# Altium PCB F4baseband.PcbDoc (part 1 of 2)
Units mm, origin at the board's own origin, x right, y up, seen from the top; angles counter-clockwise.
Board outline 50 x 50 mm, 4 copper layers (Top Layer, Internal Plane 1, Signal Layer 1, Bottom Layer), stack 1.642 mm thick; 224 components, 186 nets, 778 pads, 288 vias.
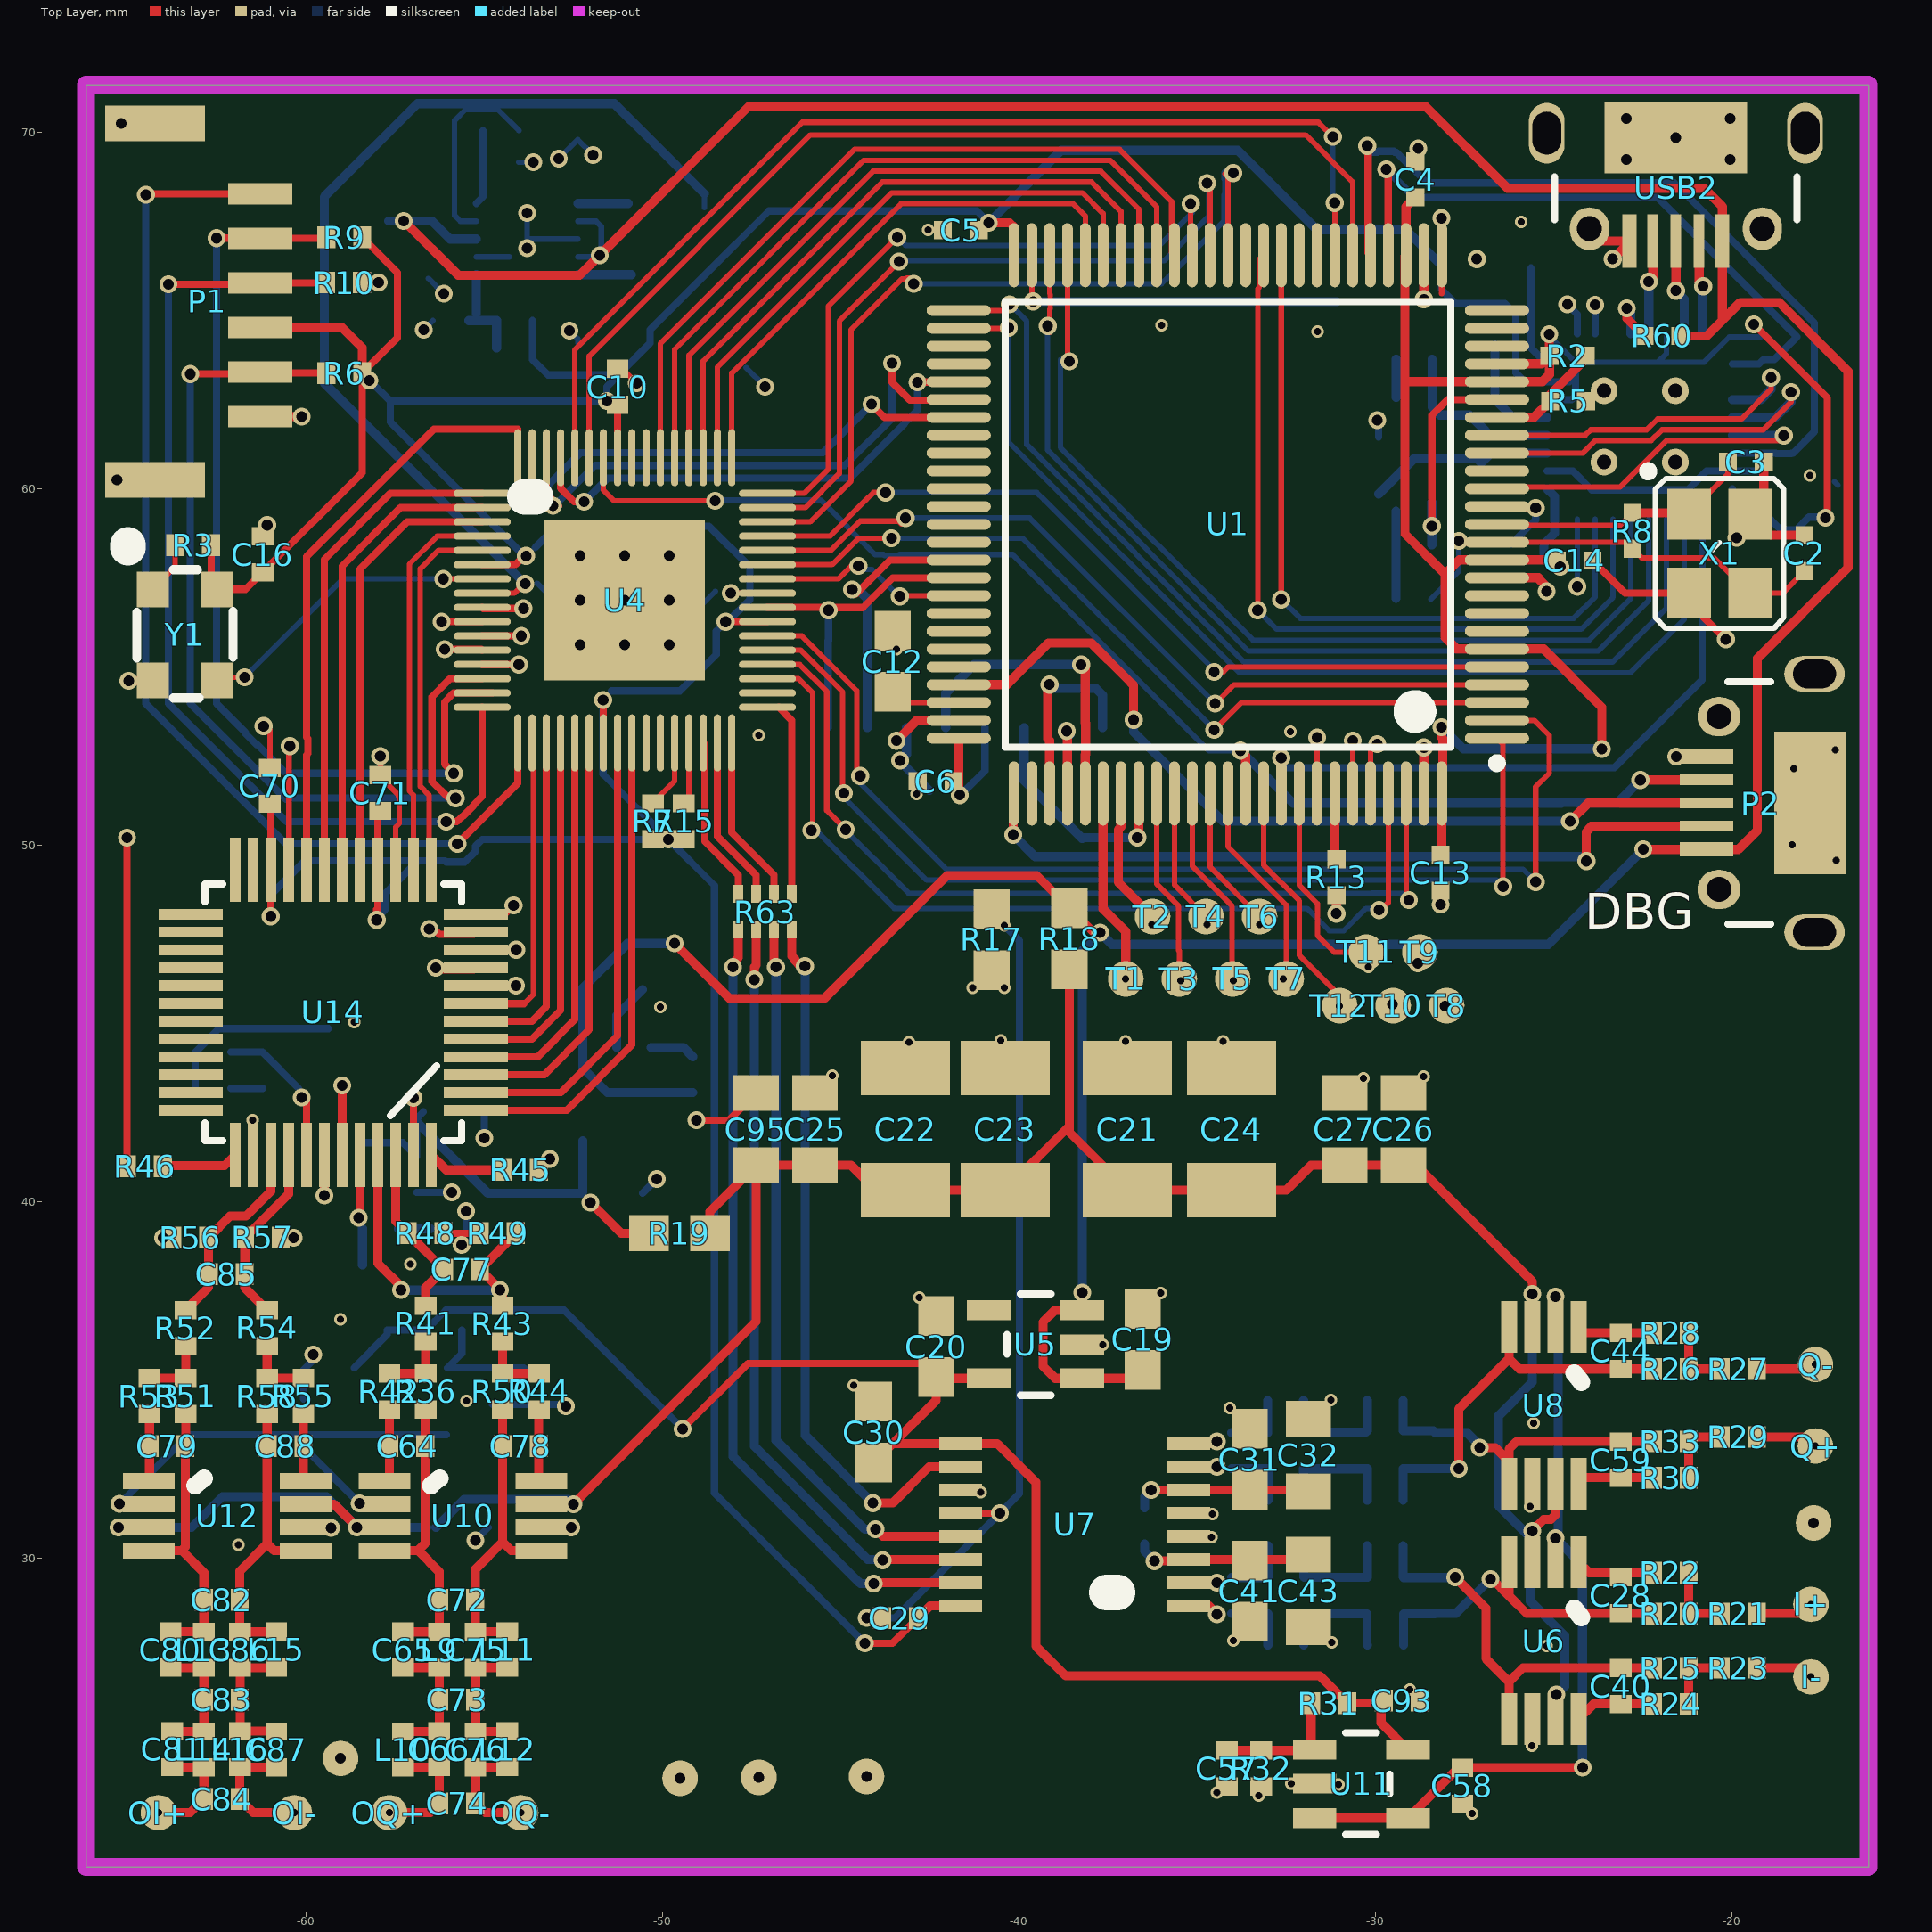
[diagram p0: Top Layer view]
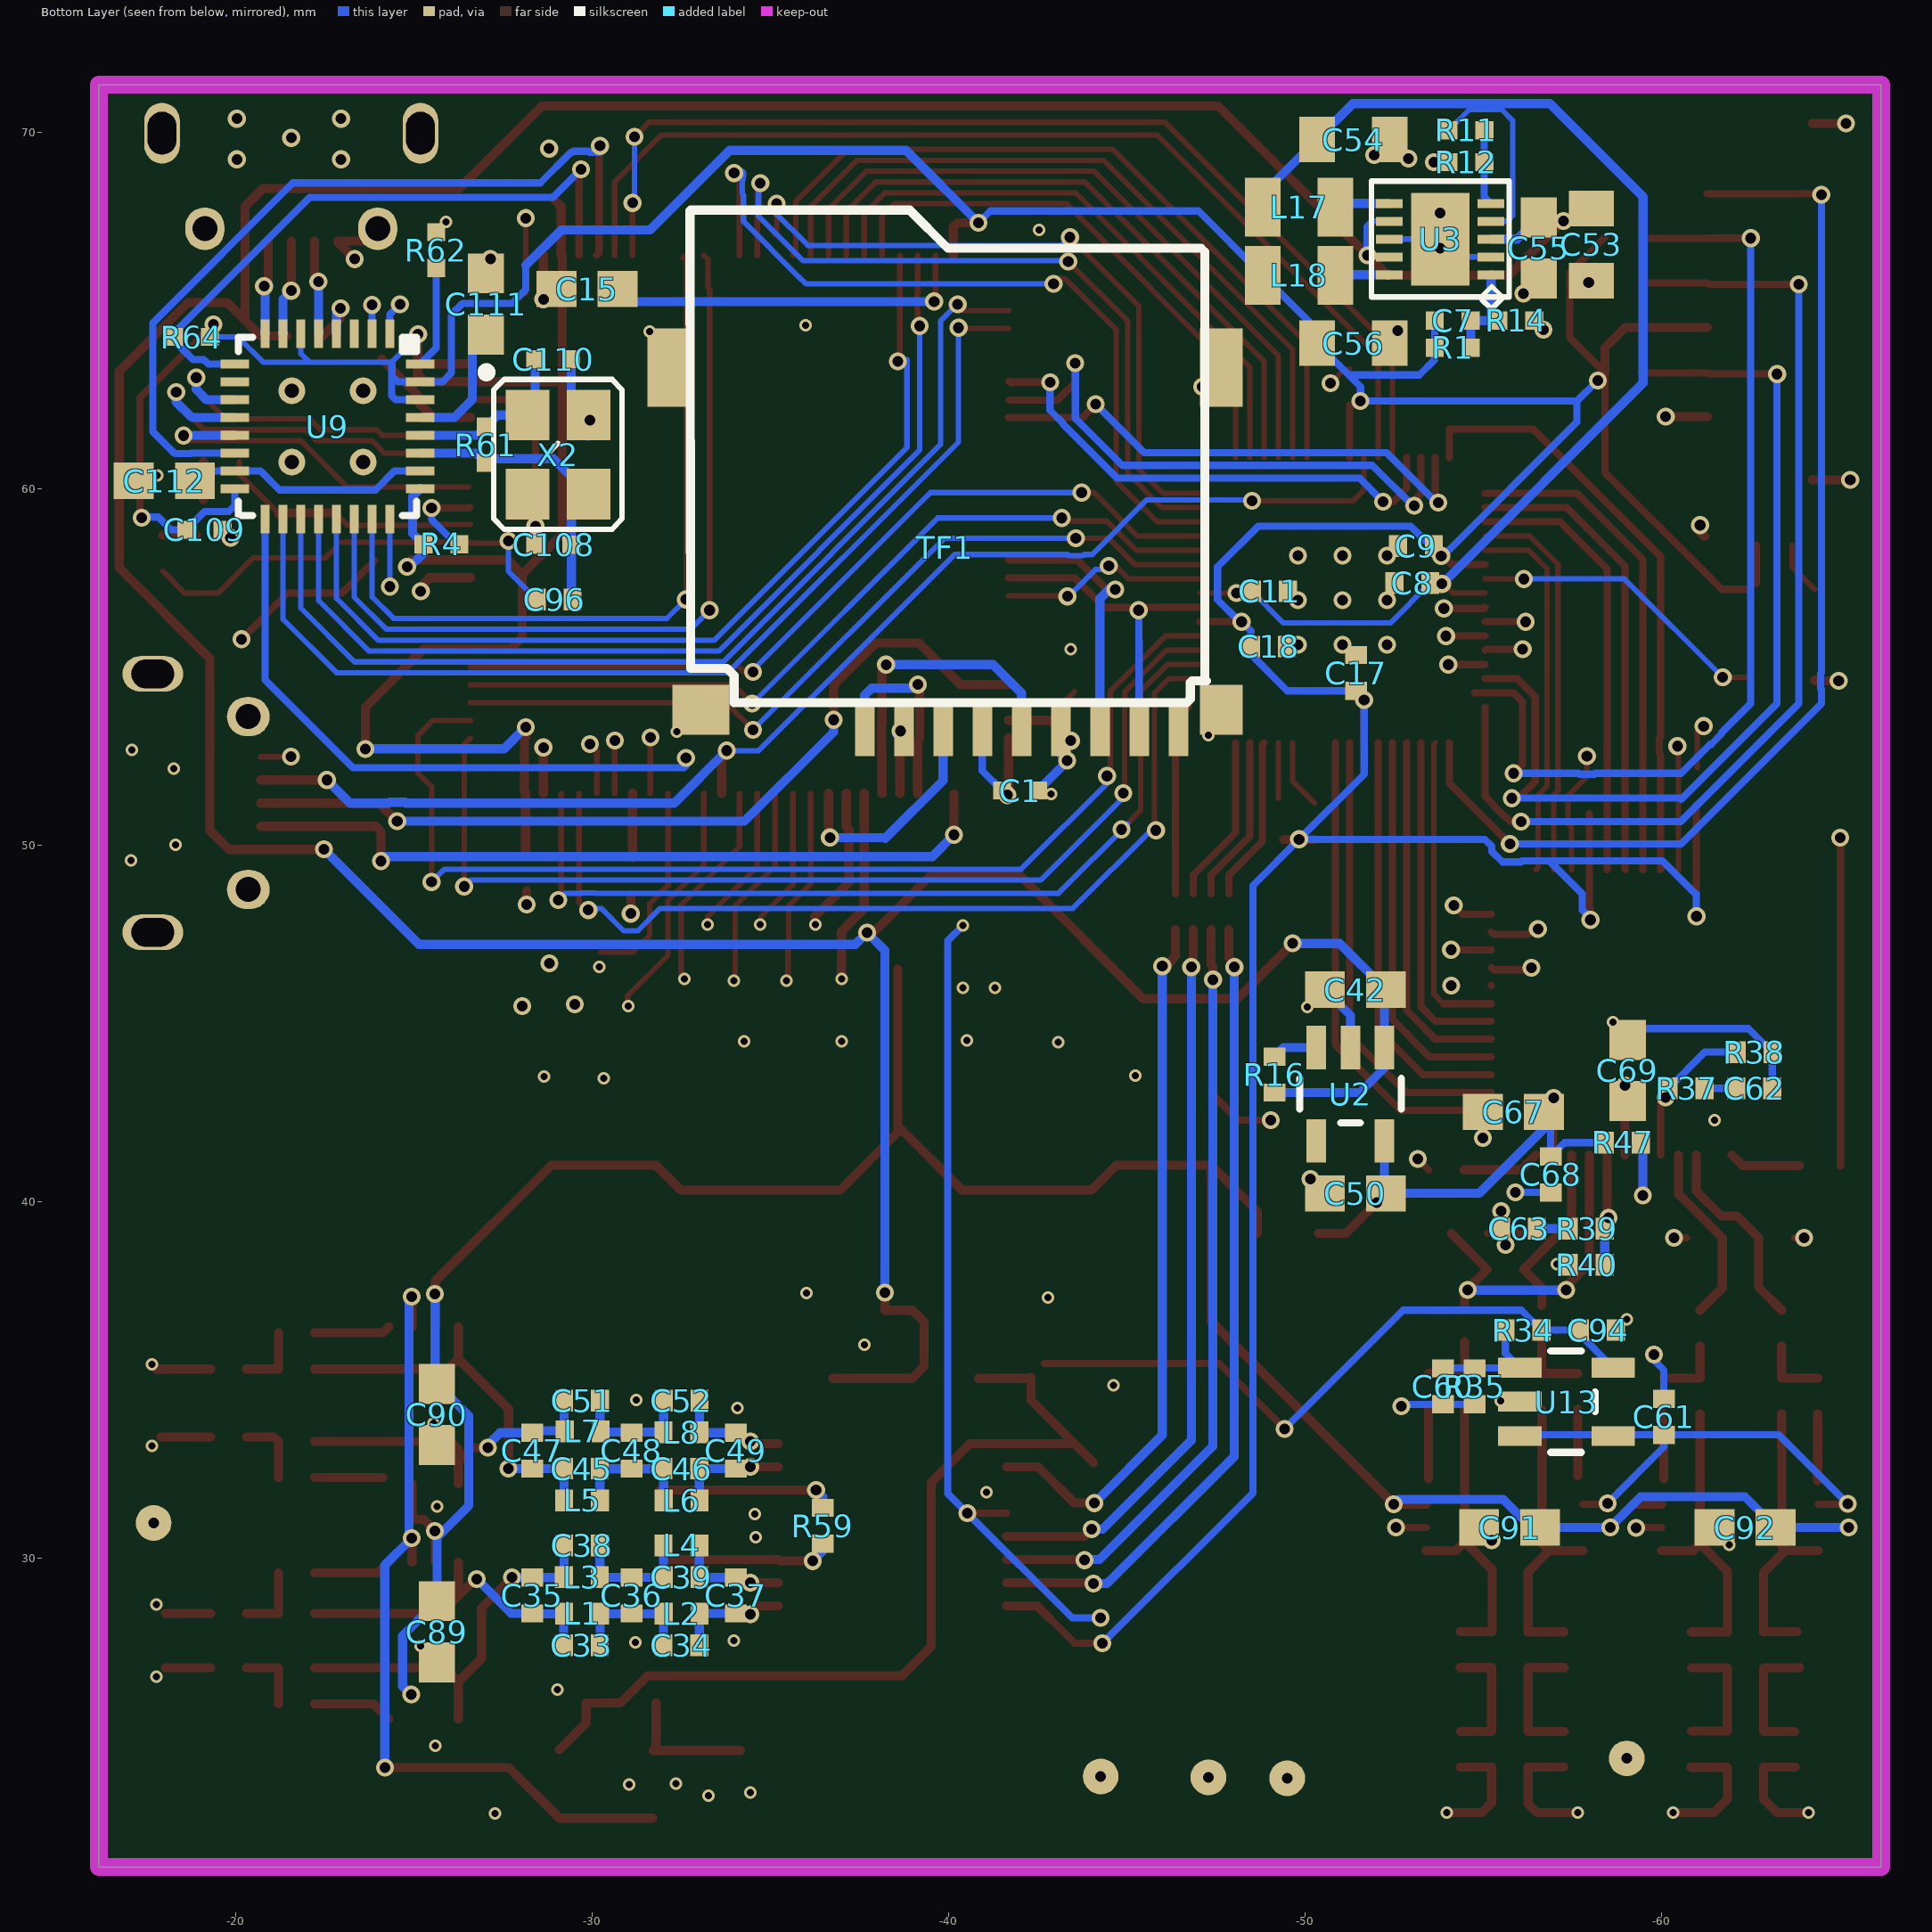
[diagram p1: Bottom Layer view, seen from below]
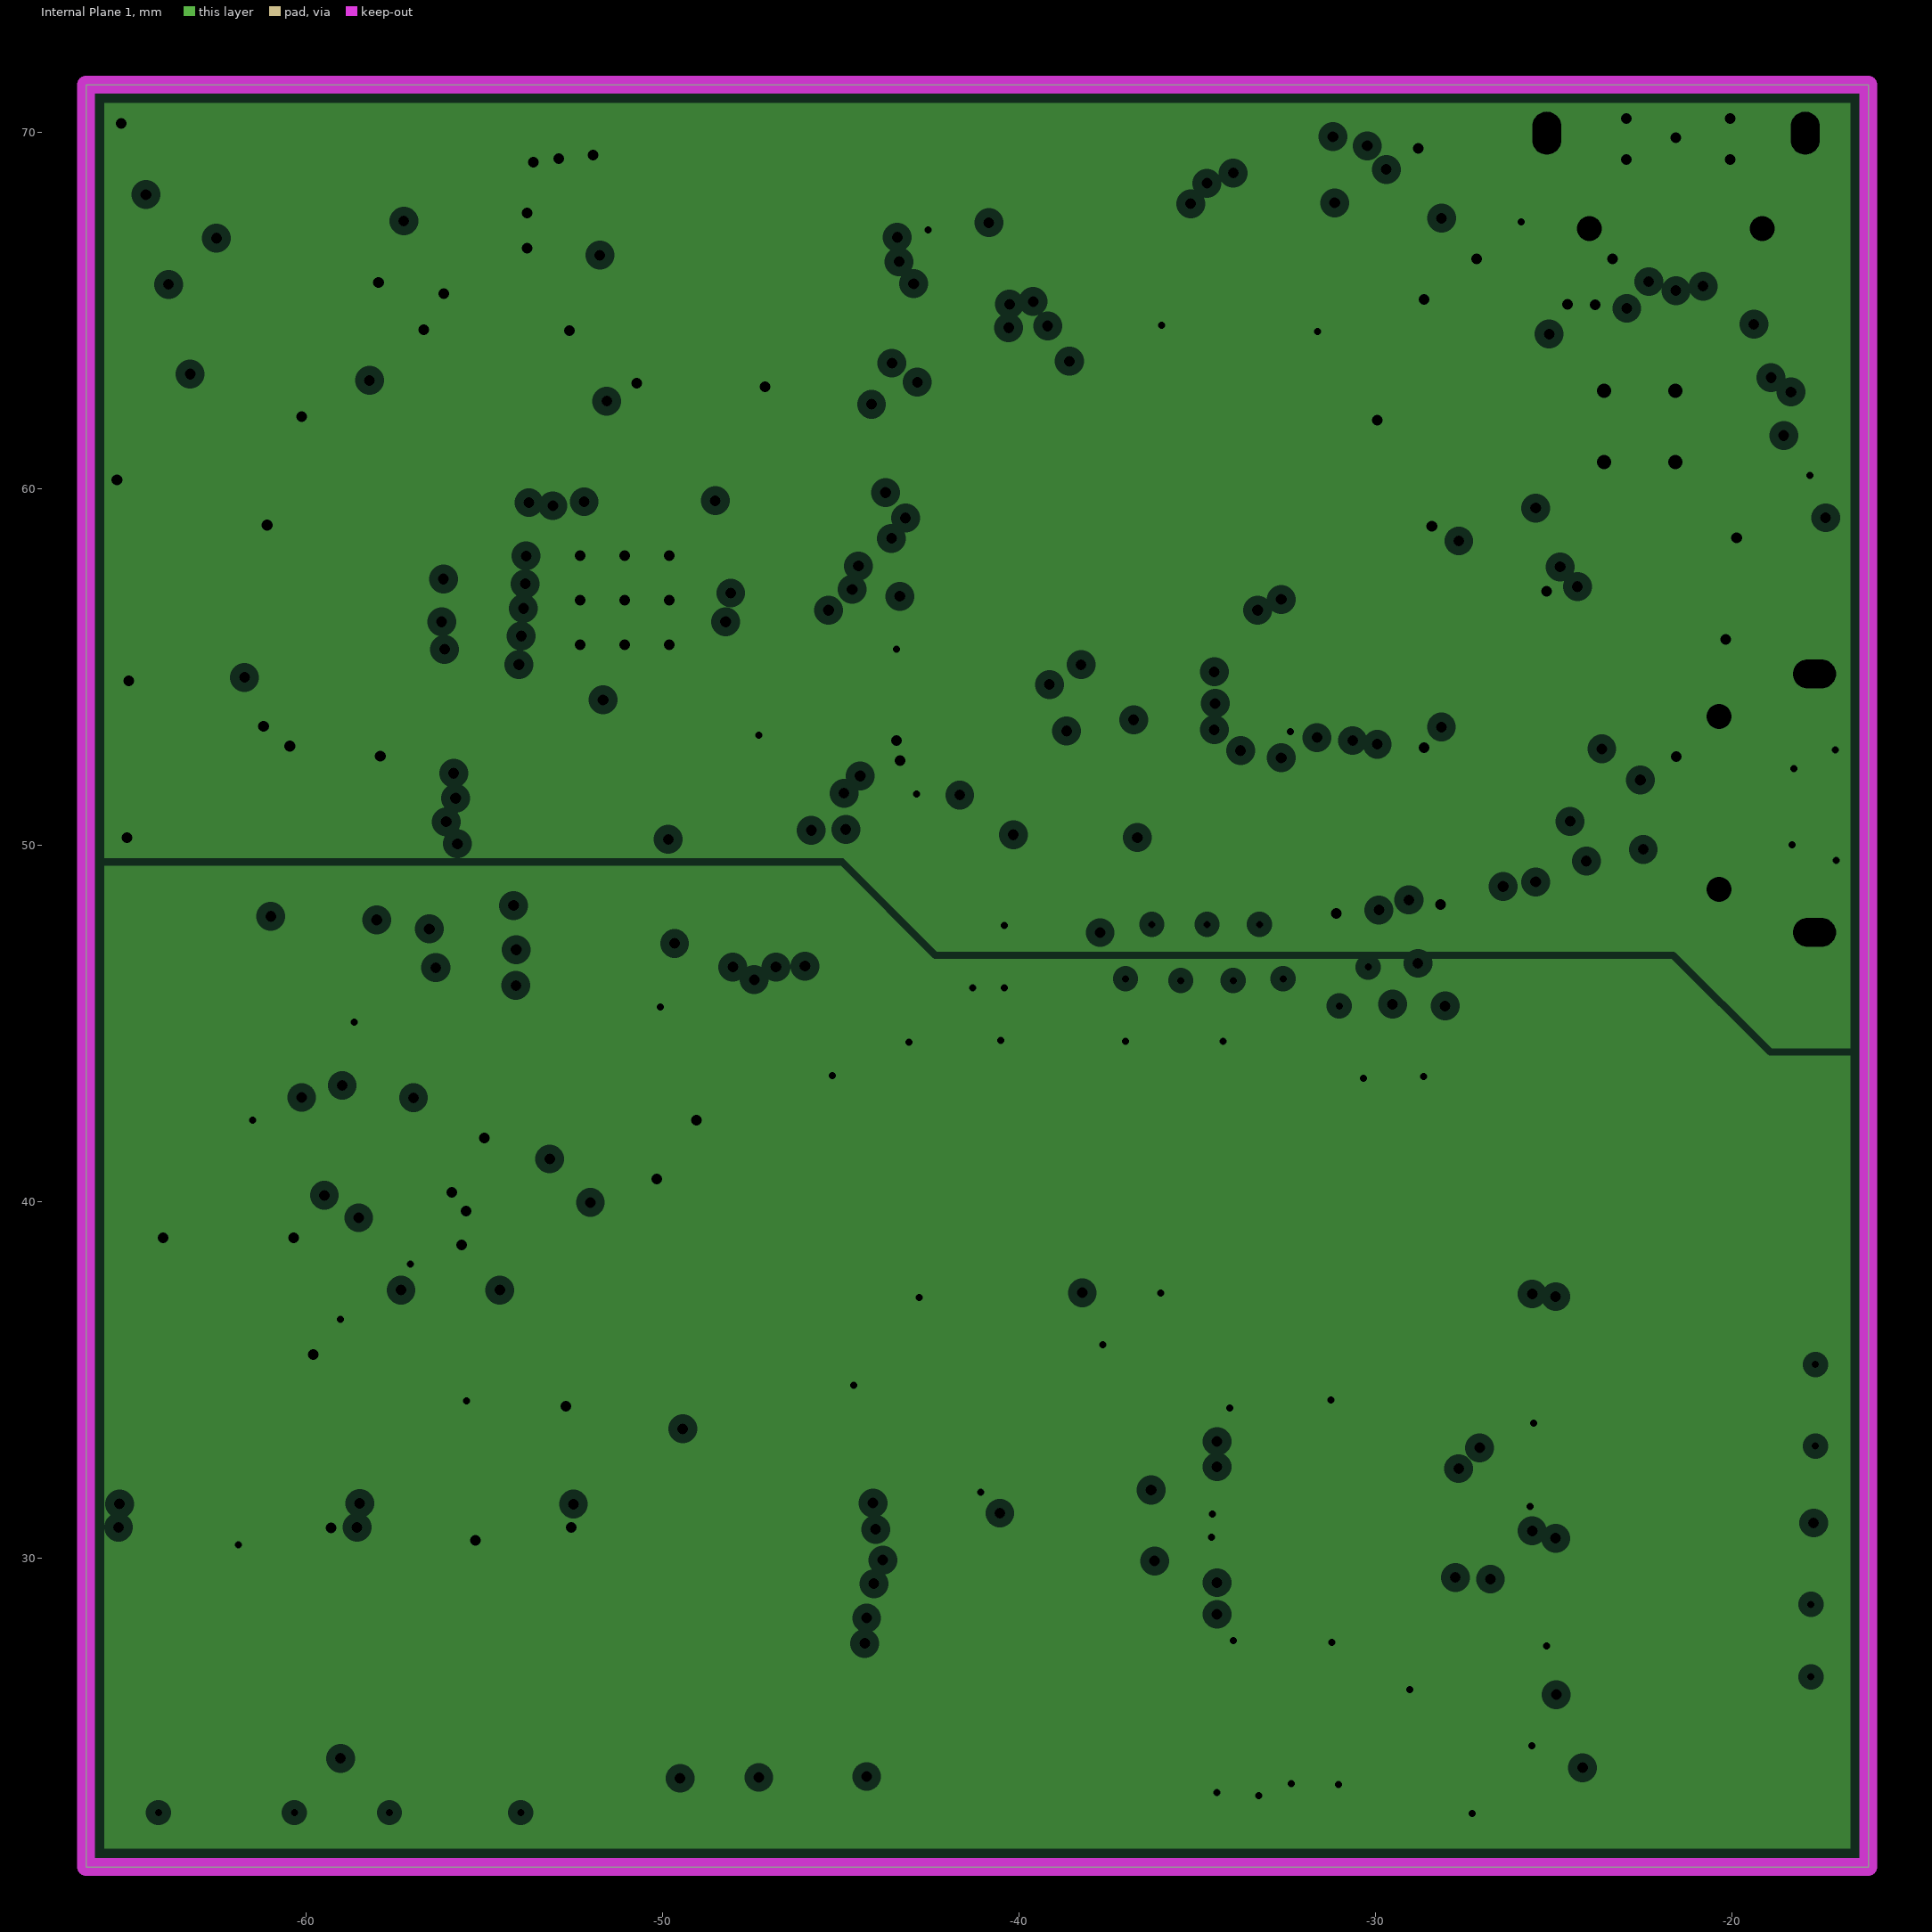
[diagram p2: Internal Plane 1, clearances drawn from the general rule]
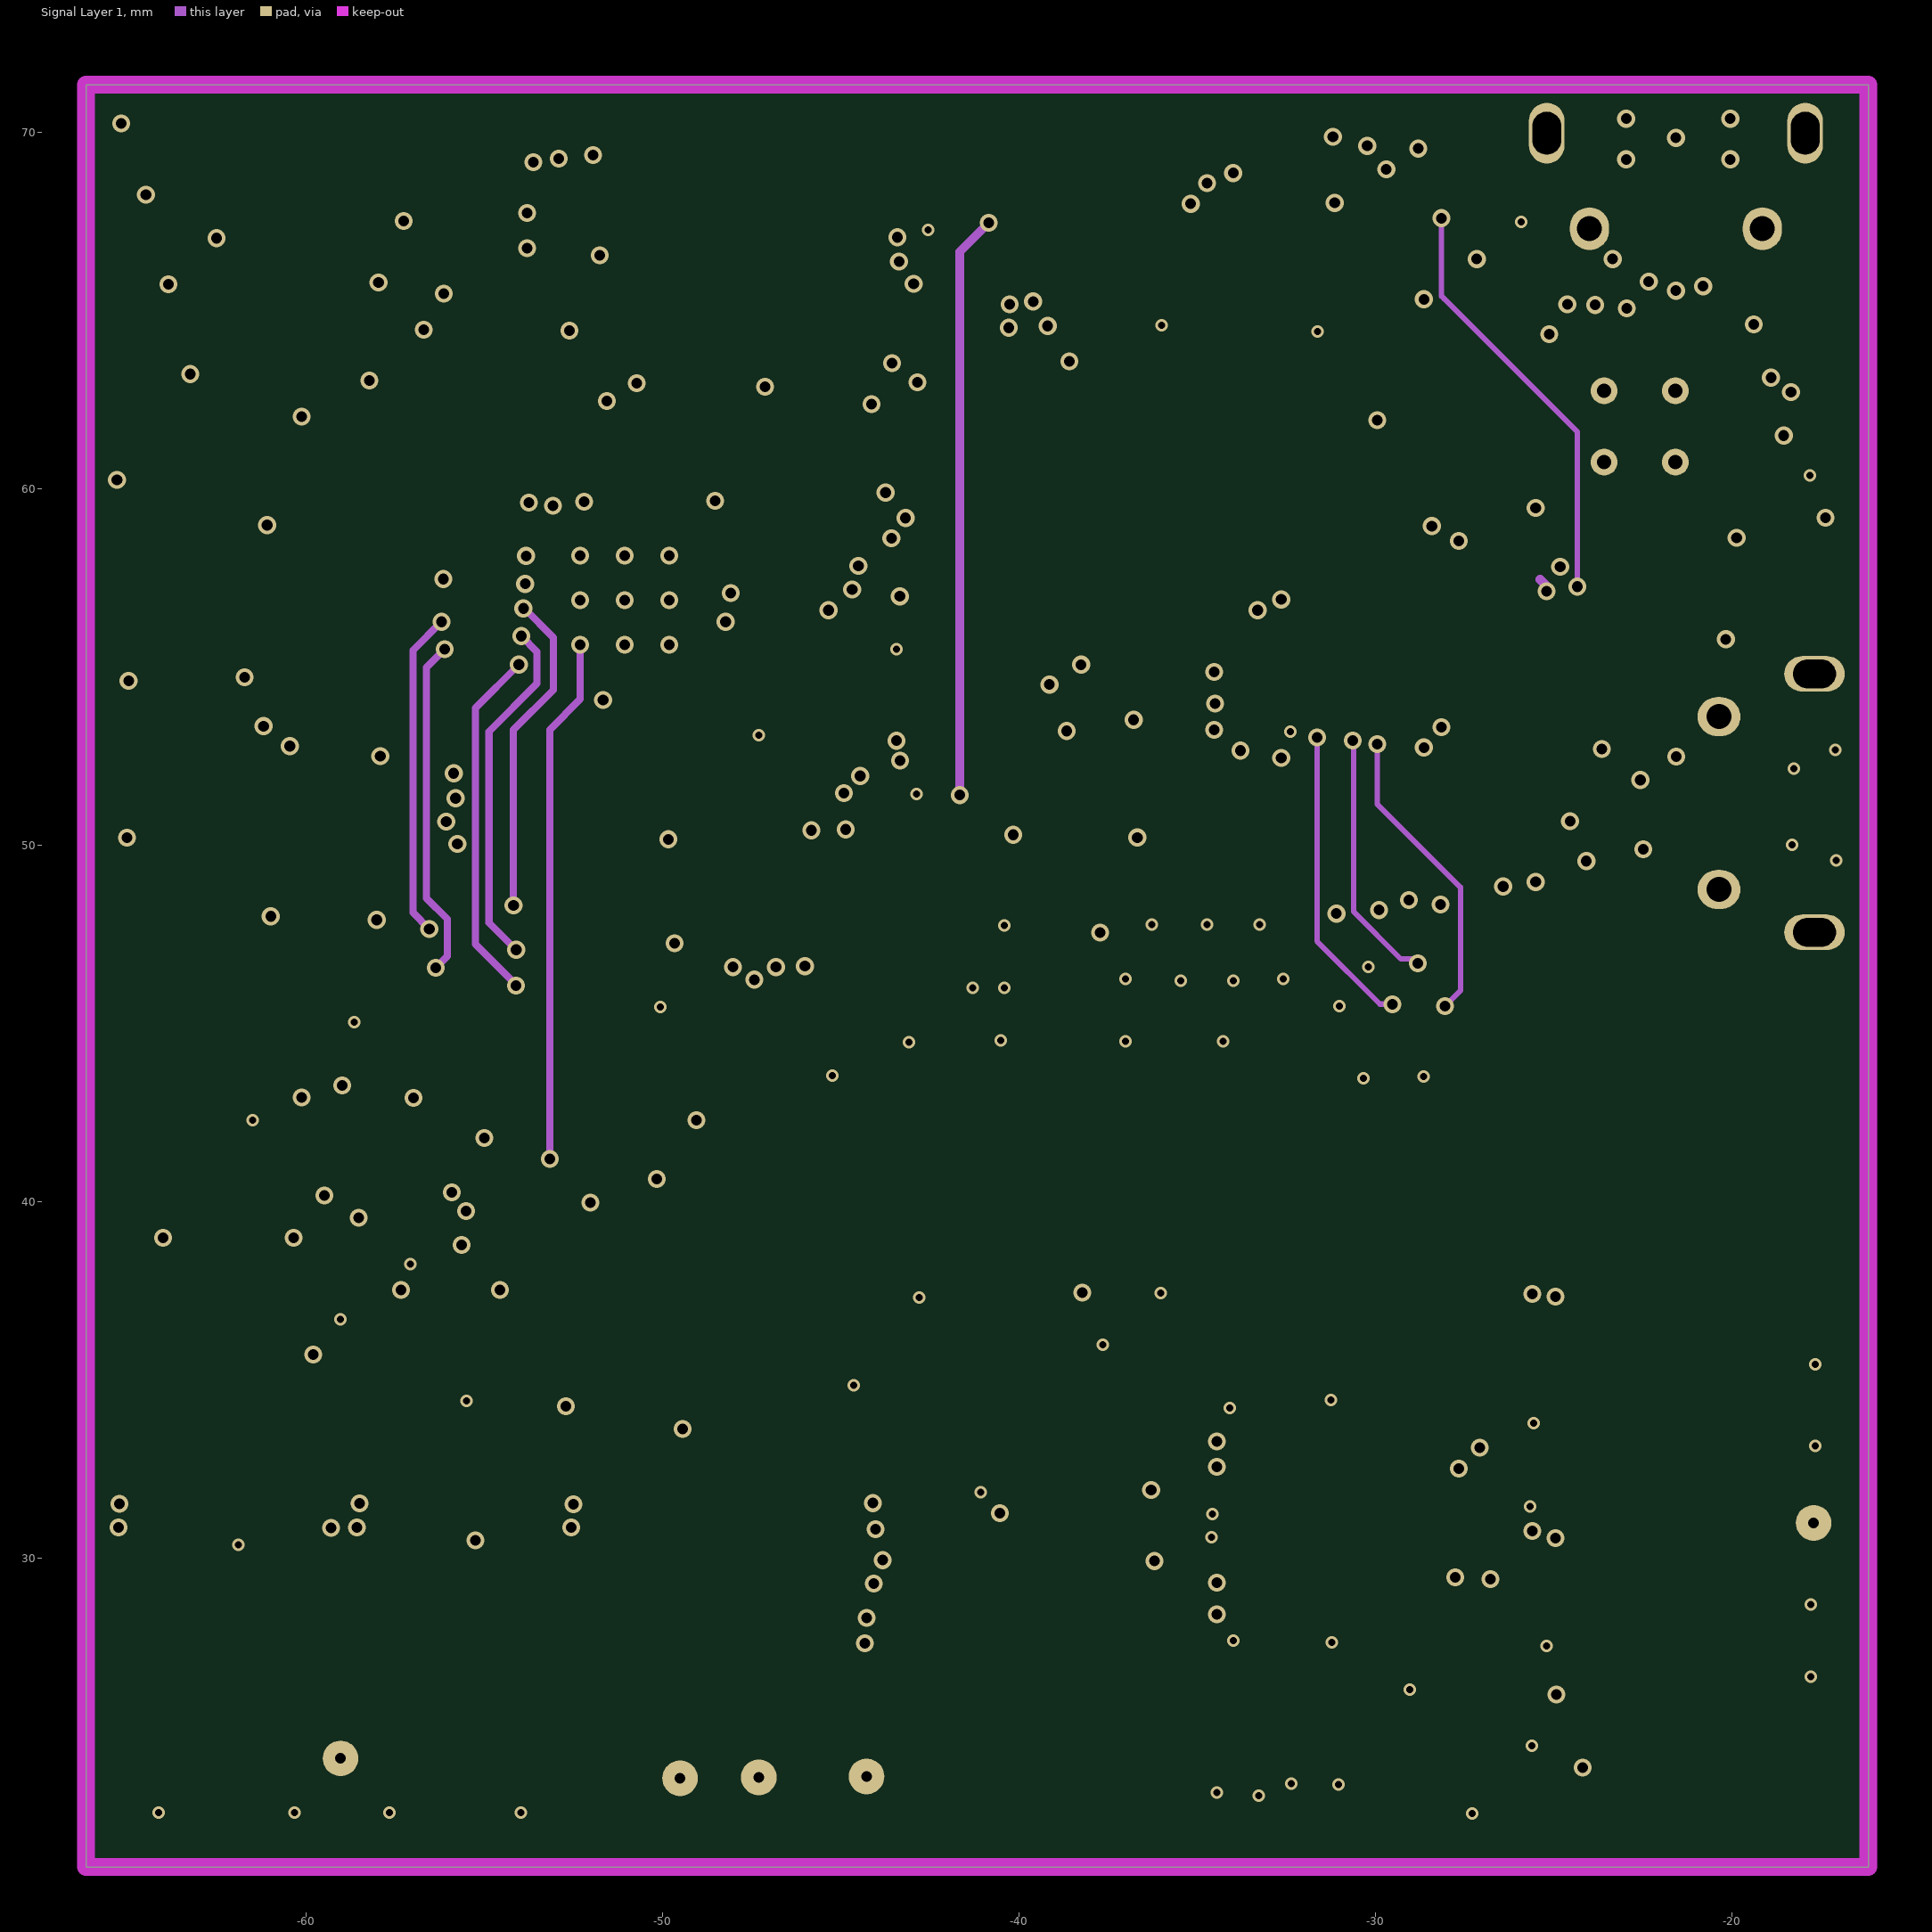
[diagram p3: Signal Layer 1]

## Layer stack, top to bottom
Top Solder: solder mask 0.0102, Solder Resist, Dk 3.5
Top Layer: signal copper 0.0356
Dielectric 1: core 0.1524, FR-4, Dk 4.2
Internal Plane 1: plane copper 0.036, net (Multiple Nets)
Dielectric 3: prepreg 1.1938, Dk 4.2
Signal Layer 1: signal copper 0.036
Dielectric 2: core 0.1524, Dk 4.2
Bottom Layer: signal copper 0.0356
Bottom Solder: solder mask 0.0102, Solder Resist, Dk 3.5

## Board outline
-66.167,21.336 -16.167,21.336 -16.167,71.336 -66.167,71.336

## Design rules (kind name [scope] priority, off if disabled: settings)
Clearance [All] p1: gap=0.152
DiffPairsRouting [All] p1: maxlimit=0.254 minlimit=0.254 mostfreqgap=0.254 toplayer_minwidth=0.152 toplayer_maxwidth=0.381 toplayer_prefwidth=0.381 midlayer1_minwidth=0.152 midlayer1_maxwidth=0.381 midlayer1_prefwidth=0.381 bottomlayer_minwidth=0.152 bottomlayer_maxwidth=0.381 bottomlayer_prefwidth=0.381 maxuncoupledlength=12.7
MinimumSolderMaskSliver [All] p1 off: minsoldermaskwidth=0.254
PlaneClearance [All] p1: clearance=0.254
PlaneConnect [All] p1: planeconnectstyle=Direct reliefexpansion=0.508 reliefentries=4 reliefconductorwidth=0.254 reliefairgap=0.254
PolygonConnect [All] p1: connectstyle=Direct reliefconductorwidth=0.254 reliefentries=4 polygonreliefangle="90 Angle" airgapwidth=0.254
RoomDefinition DAC [InComponentClass('DAC')] p1 off: confinementstyle=ConfineIn formatcopy=TRUE lockcomponents=FALSE outline -14.859,23.114 7.239,23.114 7.239,36.83 -14.859,36.83
RoomDefinition ADC [InComponentClass('ADC')] p2 off: confinementstyle=ConfineIn formatcopy=TRUE lockcomponents=FALSE outline -15.011,22.758 -1.016,22.758 -1.016,33.376 -15.011,33.376
RoomDefinition CPLD [InComponentClass('CPLD')] p3 off: confinementstyle=ConfineIn formatcopy=TRUE lockcomponents=FALSE outline -15.011,22.758 67.081,22.758 67.081,36.576 -15.011,36.576
RoomDefinition power [InComponentClass('power')] p4 off: confinementstyle=ConfineIn formatcopy=TRUE lockcomponents=FALSE outline -15.113,22.86 44.45,22.86 44.45,28.956 -15.113,28.956
RoomDefinition mcu2 [InComponentClass('mcu2')] p5 off: confinementstyle=ConfineIn formatcopy=TRUE lockcomponents=FALSE outline 36.576,20.32 224.155,20.32 224.155,30.48 36.576,30.48
RoomDefinition USB_HS [InComponentClass('USB_HS')] p6 off: confinementstyle=ConfineIn formatcopy=TRUE lockcomponents=FALSE outline 37.719,59.436 109.093,59.436 109.093,103.124 37.719,103.124
RoutingVias [All] p1: holewidth=0.305 width=0.508 viastyle="Through Hole" minholewidth=0.3 minwidth=0.5 maxholewidth=0.711 maxwidth=1.27
SilkToBoardRegionClearance [All] p1 off:
SilkToSilkClearance [All] p1 off: silktosilkclearance=0.254
SilkToSolderMaskClearance [IsPad] p1 off: minsilkscreentomaskgap=0.254 clearancetoexposedcopper=TRUE
SolderMaskExpansion [All] p1: expansion=0.102
UnpouredPolygon [All] p1: allowunpoured=FALSE
Width [All] p1: maxlimit=1.524 minlimit=0.152 preferedwidth=0.152
22 further rules are at their usual default settings.

## Classes and differential pairs
component class DAC: C60 C61 C62 C63 C64 C65 C66 C67 C68 C69 C70 C71 C72 C73 C74 C75 C76 C77 C78 C79 C80 C81 C82 C83 C84 C85 C86 C87 C88 C91 C92 C94 L9 L10 L11 L12 L13 L14 L15 L16 OI+ OI- OQ+ OQ- R34 R35 R36 R37 R38 R39 R40 R41 R42 R43 R44 R45 R46 R47 R48 R49 R50 R51 R52 R53 R54 R55 R56 R57 R58 U10 U12 U13 U14
component class CPLD: C8 C9 C10 C11 C16 C17 C18 P1 R3 R6 R7 R9 R10 R15 U4 Y1
component class power: C7 C19 C20 C21 C22 C23 C24 C25 C26 C27 C42 C50 C53 C54 C55 C56 C95 L17 L18 R1 R11 R12 R14 R16 R17 R18 R19 U2 U3 U5
component class USB_HS: C108 C109 C110 C111 C112 R60 R61 R62 R64 U9 USB2 X2
component class mcu2: C1 C2 C3 C4 C5 C6 C12 C13 C14 C15 C96 P2 R2 R4 R5 R8 R13 T1 T2 T3 T4 T5 T6 T7 T8 T9 T10 T11 T12 TF1 U1 X1
component class ADC: C28 C29 C30 C31 C32 C33 C34 C35 C36 C37 C38 C39 C40 C41 C43 C44 C45 C46 C47 C48 C49 C51 C52 C57 C58 C59 C89 C90 C93 I+ I- L1 L2 L3 L4 L5 L6 L7 L8 Q+ Q- R20 R21 R22 R23 R24 R25 R26 R27 R28 R29 R30 R31 R32 R33 R59 R63 U6 U7 U8 U11

## Components (designator, comment, footprint, x,y, rotation, side; value= is the part's Value field where it differs from the comment)
C1 "0.1uF" 0402#1 -42.012,51.537 r0 bottom
C2 "22pF" 0402#1 -17.958,58.191 r90 top
C3 "22pF" 0402#1 -19.609,60.757 r0 top
C4 "0.1uF * 5" 0402#1 -28.88,68.682 r270 top
C5 "1n" 0402#1 -41.631,67.259 r0 top
C6 "1n" 0402#1 -42.342,51.791 r0 top
C7 "33pF" 0402#1 -54.153,64.718 r0 bottom
C8 "0.1uF" 0402#2 -53.01,57.353 r180 bottom
C9 "0.1uF" 0402#2 -53.111,58.395 r180 bottom
C10 "0.1uF" 0402#2 -51.257,62.865 r270 top
C11 "0.1uF" 0402#2 -49.022,57.125 r0 bottom
C12 "2.2uF" 0603 -43.536,55.169 r270 top
C13 "1n" 0402#1 -28.169,49.225 r90 top
C14 "1n" 0402#1 -24.409,57.988 r180 top
C15 "2.2uF" 0603 -29.87,65.608 r0 bottom
C16 "0.1uF" 0402#2 -61.214,58.166 r270 top
C17 "0.1uF" 0402#2 -51.435,54.839 r270 bottom
C18 "0.1uF" 0402#2 -48.997,55.575 r0 bottom
C19 "4.7uF" 0603 -36.525,36.144 r270 top
C20 "4.7uF" 0603 -42.316,35.941 r270 top
C21 "220uF" 1210 -36.957,42.037 r270 top
C22 "220uF" 1210 -43.18,42.037 r270 top
C23 "220uF" 1210 -40.386,42.037 r270 top
C24 "220uF" 1210 -34.036,42.037 r270 top
C25 "10uF" 0805 -45.72,42.037 r270 top
C26 "10uF" 0805 -29.21,42.037 r270 top
C27 "10uF" 0805 -30.861,42.037 r270 top
C28 "NC" 0402#2 -23.114,28.956 r90 top
C29 "0.1uF" 0402#2 -43.332,28.321 r180 top
C30 "0.1uF" 0603 -44.069,33.528 r90 top
C31 "10uF" 0603 -33.528,32.766 r90 top
C32 "1uF" 0805 -31.877,32.893 r90 top
C33 "NC" 0402#2 -29.718,27.559 r0 bottom
C34 "NC" 0402#2 -32.512,27.559 r0 bottom
C35 "NC" 0402#2 -28.321,28.956 r270 bottom
C36 "NC" 0402#2 -31.115,28.956 r270 bottom
C37 "NC" 0402#2 -34.036,28.956 r270 bottom
C38 "NC" 0402#2 -29.718,30.353 r180 bottom
C39 "NC" 0402#2 -32.512,29.464 r180 bottom
C40 "NC" 0402#2 -23.114,26.416 r270 top
C41 "1uF" 0603 -33.528,29.083 r270 top
C42 "4.7uF" 0603 -51.41,45.949 r180 bottom
C43 "10uF" 0805 -31.877,29.083 r270 top
C44 "NC" 0402#2 -23.114,35.814 r90 top
C45 "NC" 0402#2 -29.718,32.512 r0 bottom
C46 "NC" 0402#2 -32.512,32.512 r0 bottom
C47 "NC" 0402#2 -28.321,33.02 r270 bottom
C48 "NC" 0402#2 -31.115,33.02 r270 bottom
C49 "NC" 0402#2 -34.036,33.02 r270 bottom
C50 "4.7uF" 0603 -51.41,40.234 r180 bottom
C51 "NC" 0402#2 -29.718,34.417 r180 bottom
C52 "NC" 0402#2 -32.512,34.417 r180 bottom
C53 "10UF" 0805 -58.039,66.852 r90 bottom
C54 "4.7UF" 0805 -51.359,69.798 r0 bottom
C55 "33pF" 0603 -56.566,66.75 r90 bottom
C56 "4.7UF" 0805 -51.359,64.083 r0 bottom
C57 "0.1uF" 0402#2 -34.163,24.105 r270 top
C58 "0.1uF" 0402#2 -27.559,23.622 r270 top
C59 "NC" 0402#2 -23.114,32.766 r270 top
C60 "0.1uF" 0402#2 -53.873,34.823 r270 bottom
C61 "0.1uF" 0402#2 -60.071,33.96 r90 bottom
C62 "22nF" 0402#2 -62.611,43.18 r0 bottom
C63 "22nF" 0402#2 -56.007,39.243 r180 bottom
C64 "NC" 0402#2 -57.15,33.147 r180 top
C65 "NC" 0402#2 -57.277,27.432 r90 top
C66 "NC" 0402#2 -56.261,24.638 r90 top
C67 "NC" 0603 -55.855,42.52 r0 bottom
C68 "NC" 0402#2 -56.896,40.767 r270 bottom
C69 "NC" 0603 -59.055,43.688 r270 bottom
C70 "NC" 0402#2 -61.011,51.664 r90 top
C71 "NC" 0402#2 -57.912,51.46 r90 top
C72 "NC" 0402#2 -55.753,28.829 r180 top
C73 "NC" 0402#2 -55.753,26.035 r180 top
C74 "NC" 0402#2 -55.753,23.114 r180 top
C75 "NC" 0402#2 -55.245,27.432 r270 top
C76 "NC" 0402#2 -55.245,24.638 r270 top
C77 "NC" 0402#2 -55.626,38.1 r0 top
C78 "NC" 0402#2 -53.975,33.147 r0 top
C79 "NC" 0402#2 -63.881,33.147 r180 top
C80 "NC" 0402#2 -63.805,27.432 r90 top
C81 "NC" 0402#2 -63.754,24.638 r90 top
C82 "NC" 0402#2 -62.357,28.829 r180 top
C83 "NC" 0402#2 -62.357,26.035 r180 top
C84 "NC" 0402#2 -62.357,23.241 r180 top
C85 "NC" 0402#2 -62.23,37.973 r0 top
C86 "NC" 0402#2 -61.849,27.432 r270 top
C87 "NC" 0402#2 -60.833,24.638 r270 top
C88 "NC" 0402#2 -60.579,33.147 r0 top
C89 "1uF" 0603 -25.654,27.94 r270 bottom
C90 "1uF" 0603 -25.654,34.036 r270 bottom
C91 "1uF" 0603 -55.753,30.861 r0 bottom
C92 "1uF" 0603 -62.357,30.861 r0 bottom
C93 "0.1uF" 0402#2 -29.261,26.01 r0 top
C94 "0.1uF" 0402#2 -58.217,36.398 r180 bottom
C95 "10uF" 0805 -47.371,42.037 r270 top
C96 "NC/0.1uF" 0402#2 -28.956,56.896 r0 bottom
C108 "10pF" 0402#1 -28.915,58.429 r180 bottom
C109 "1uF" 0402#1 -19.126,58.852 r180 bottom
C110 "10pF" 0402#1 -28.915,63.636 r0 bottom
C111 "1uF" 0603 -27.026,65.176 r90 bottom
C112 "1uF" 0603 -18.009,60.223 r0 bottom
I+ "TestPad" "TestPad - 1mm" -17.78,28.702 r180 top
I- "TestPad" "TestPad - 1mm" -17.78,26.67 r180 top
L1 "0R" 0402#2 -29.718,28.448 r180 bottom
L2 "0R" 0402#2 -32.512,28.448 r180 bottom
L3 "0R" 0402#2 -29.718,29.464 r0 bottom
L4 "0R" 0402#2 -32.512,30.353 r0 bottom
L5 "0R" 0402#2 -29.718,31.623 r180 bottom
L6 "0R" 0402#2 -32.512,31.623 r180 bottom
L7 "0R" 0402#2 -29.743,33.553 r0 bottom
L8 "0R" 0402#2 -32.512,33.528 r0 bottom
L9 "0R" 0402#2 -56.261,27.432 r270 top
L10 "0R" 0402#2 -57.277,24.638 r270 top
L11 "0R" 0402#2 -54.356,27.432 r90 top
L12 "0R" 0402#2 -54.356,24.638 r90 top
L13 "0R" 0402#2 -62.865,27.432 r270 top
L14 "0R" 0402#2 -62.865,24.638 r270 top
L15 "0R" 0402#2 -60.833,27.432 r90 top
L16 "0R" 0402#2 -61.849,24.638 r90 top
L17 "2.2UH" 0806 -49.835,67.893 r0 bottom
L18 "2.2uH" 0806 -49.835,65.988 r0 bottom
OI+ "TestPad" "TestPad - 1mm" -64.135,22.86 r0 top
OI- "TestPad" "TestPad - 1mm" -60.325,22.86 r0 top
OQ+ "TestPad" "TestPad - 1mm" -57.658,22.86 r0 top
OQ- "TestPad" "TestPad - 1mm" -53.975,22.86 r0 top
P1 "JTAG-6P" GH1.25-6 -62.738,65.151 r270 top
P2 "SWD_MicroUSB" MICRO-YZX -14.859,51.181 r90 top
Q+ "TestPad" "TestPad - 1mm" -17.653,33.147 r180 top
Q- "TestPad" "TestPad - 1mm" -17.653,35.433 r180 top
R1 "300k" 0402#1 -54.153,63.956 r0 bottom
R2 "0R" 0402#1 -24.613,63.729 r0 top
R3 "10k" 0402#2 -63.17,58.42 r0 top
R4 "10k" 0402#1 -25.781,58.445 r0 bottom
R5 "NC" 0402#1 -24.587,62.459 r180 top
R6 "10k" 0402#2 -58.928,63.246 r0 top
R7 "10k" 0402#2 -50.267,50.673 r270 top
R8 "" 0402#1 -22.784,58.826 r270 top
R9 "10k" 0402#2 -58.928,67.056 r0 top
R10 "1k" 0402#2 -58.928,65.786 r180 top
R11 "360K" 0402#1 -54.534,70.052 r0 bottom
R12 "180k" 0402#1 -54.534,69.163 r0 bottom
R13 "10k" 0402#1 -31.09,49.098 r90 top
R14 "68k" 0402#1 -55.931,64.718 r180 bottom
R15 "10k" 0402#2 -49.403,50.673 r270 top
R16 "10K" 0402#2 -49.149,43.561 r90 bottom
R17 "0R" 0603 -40.767,47.346 r90 top
R18 "0R" 0603 -38.583,47.371 r90 top
R19 "NC" 0603 -49.53,39.116 r0 top
R20 "1.33k" 0402#2 -21.717,28.448 r0 top
R21 "1.33k" 0402#2 -19.812,28.448 r0 top
R22 "931R" 0402#2 -21.717,29.591 r0 top
R23 "1.33k" 0402#2 -19.812,26.924 r0 top
R24 "931R" 0402#2 -21.717,25.908 r0 top
R25 "1.33k" 0402#2 -21.717,26.924 r0 top
R26 "1.33k" 0402#2 -21.717,35.306 r0 top
R27 "1.33k" 0402#2 -19.812,35.306 r0 top
R28 "931R" 0402#2 -21.717,36.322 r0 top
R29 "1.33k" 0402#2 -19.812,33.401 r0 top
R30 "931R" 0402#2 -21.717,32.258 r0 top
R31 "1.33k" 0402#2 -31.293,25.933 r180 top
R32 "1.33k" 0402#2 -33.198,24.105 r270 top
R33 "1.33k" 0402#2 -21.717,33.274 r0 top
R34 "1.33k" 0402#2 -56.134,36.398 r0 bottom
R35 "1.33k" 0402#2 -54.762,34.823 r270 bottom
R36 "1.33k" 0402#2 -56.642,34.671 r90 top
R37 "256R" 0402#2 -60.706,43.18 r180 bottom
R38 "2k" 0402#2 -62.611,44.196 r180 bottom
R39 "256R" 0402#2 -57.912,39.243 r0 bottom
R40 "2k" 0402#2 -57.912,38.227 r0 bottom
R41 "1.33k" 0402#2 -56.642,36.576 r90 top
R42 "931R" 0402#2 -57.658,34.671 r90 top
R43 "1.33k" 0402#2 -54.483,36.576 r90 top
R44 "931R" 0402#2 -53.467,34.671 r90 top
R45 "1k" 0402#2 -53.975,40.894 r0 top
R46 "1k" 0402#2 -64.516,40.996 r180 top
R47 "1k" 0402#2 -58.928,41.656 r0 bottom
R48 "50" 0402#2 -56.642,39.116 r180 top
R49 "50" 0402#2 -54.61,39.116 r180 top
R50 "1.33k" 0402#2 -54.483,34.671 r90 top
R51 "1.33k" 0402#2 -63.373,34.544 r90 top
R52 "1.33k" 0402#2 -63.373,36.449 r90 top
R53 "931R" 0402#2 -64.389,34.544 r90 top
R54 "1.33k" 0402#2 -61.087,36.449 r90 top
R55 "931R" 0402#2 -60.071,34.544 r90 top
R56 "50" 0402#2 -63.246,38.989 r0 top
R57 "50" 0402#2 -61.214,38.989 r0 top
R58 "1.33k" 0402#2 -61.087,34.544 r90 top
R59 "NC/0R" 0402#2 -36.474,30.912 r270 bottom
R60 "10k" 0402#1 -21.946,64.287 r180 top
R61 "1MR" 0402#1 -27.026,61.239 r270 bottom
R62 "12k 1%" 0402#1 -25.629,66.7 r270 bottom
R63 "Res*4" 0402X4 -47.117,48.133 r270 top
R64 "10k" 0402#1 -18.771,64.262 r180 bottom
T1 "TestPad" "TestPad - 1mm" -37,46.25 r0 top
T2 "TestPad" "TestPad - 1mm" -36.25,48 r0 top
T3 "TestPad" "TestPad - 1mm" -35.5,46.25 r0 top
T4 "TestPad" "TestPad - 1mm" -34.75,48 r0 top
T5 "TestPad" "TestPad - 1mm" -34,46.25 r0 top
T6 "TestPad" "TestPad - 1mm" -33.25,48 r0 top
T7 "TestPad" "TestPad - 1mm" -32.5,46.25 r0 top
T8 "TestPad" "TestPad - 1mm" -28,45.5 r180 top
T9 "TestPad" "TestPad - 1mm" -28.75,47 r180 top
T10 "TestPad" "TestPad - 1mm" -29.5,45.5 r270 top
T11 "TestPad" "TestPad - 1mm" -30.25,47 r270 top
T12 "TestPad" "TestPad - 1mm" -31,45.5 r270 top
TF1 "TF" TF -47.65,63.398 r0 bottom
U1 "STM32F427VGT6" LQFP100_N -34.138,59.004 r180 top
U2 "RT9013-3.3GB" SOT23-5 -51.283,43.028 r0 bottom
U3 "Tps62410" DFN-10P-3X3 -53.772,67.004 r0 bottom
U4 "5M160ZE64" 5M160ZE64 -51.054,56.871 r0 top
U5 "RT9013-2.5GB" SOT23-5 -39.522,35.992 r90 top
U6 "DiffAmp" MSOP8/VSSOP8 -25.273,27.686 r270 top
U7 "AD7537" AD7357 -38.43,30.937 r180 top
U8 "DiffAmp" MSOP8/VSSOP8 -25.273,34.29 r270 top
U9 "USB3300_1" USB3300 -22.581,61.747 r270 bottom
U10 "DiffAmp" MSOP8/VSSOP8 -55.601,31.191 r0 top
U11 "OP-SOT23" SOT23-5 -30.404,23.673 r270 top
U12 "DiffAmp" MSOP8/VSSOP8 -62.205,31.191 r0 top
U13 "OP-SOT23" SOT23-5 -57.328,34.392 r270 bottom
U14 "AD9767" AD9767 -59.233,45.314 r180 top
USB2 "USB Micro Type B" MICRO-YZX -21.565,72.796 r180 top
X1 "8mhz" OSCILLATOR-3.2X2.5 -20.345,58.191 r270 top
X2 "24mhz" OSCILLATOR-3.2X2.5 -29.042,60.969 r270 bottom
Y1 "OSC_50M" TXC_7Q -63.398,55.905 r270 top

## Footprints (in the part's own frame and the unit in brackets; to place one, negate y for a bottom-side part, rotate by r counter-clockwise, add the part's x,y. Pads: shape width x height; smd on the part's side, far side on the other; paste and mask are expansions set on the pad)
5M160ZE64 [mm]
  rect 4.5x4.5 smd: 0(0,0)
  oval 1.6x0.2 smd: 1(-4,3) 2(-4,2.6) 3(-4,2.2) 4(-4,1.8) 5(-4,1.4) 6(-4,1) 7(-4,0.6) 8(-4,0.2) 9(-4,-0.2) 10(-4,-0.6) 11(-4,-1) 12(-4,-1.4) 13(-4,-1.8) 14(-4,-2.2) 15(-4,-2.6) 16(-4,-3) 33(4,-3) 34(4,-2.6) 35(4,-2.2) 36(4,-1.8) 37(4,-1.4) 38(4,-1) 39(4,-0.6) 40(4,-0.2) 41(4,0.2) 42(4,0.6) 43(4,1) 44(4,1.4) 45(4,1.8) 46(4,2.2) 47(4,2.6) 48(4,3)
  oval 0.2x1.6 smd: 17(-3,-4) 18(-2.6,-4) 19(-2.2,-4) 20(-1.8,-4) 21(-1.4,-4) 22(-1,-4) 23(-0.6,-4) 24(-0.2,-4) 25(0.2,-4) 26(0.6,-4) 27(1,-4) 28(1.4,-4) 29(1.8,-4) 30(2.2,-4) 31(2.6,-4) 32(3,-4) 49(3,4) 50(2.6,4) 51(2.2,4) 52(1.8,4) 53(1.4,4) 54(1,4) 55(0.6,4) 56(0.2,4) 57(-0.2,4) 58(-0.6,4) 59(-1,4) 60(-1.4,4) 61(-1.8,4) 62(-2.2,4) 63(-2.6,4) 64(-3,4)
  silkscreen extent -2.8,2.9 -2.5,2.9, body extent -3.5,-3.5 3.5,3.5, height 1
0402#1 [mil] "0402-RES"
  rect 20x20 smd: 1(-19.68,0) 2(20,0)
0402#2 [mil] "0402-RES"
  rect 20x24 smd: 1(-19.68,0) 2(20,0)
0402X4 [mm]
  rect 0.5x0.28 smd: 1(-0.5,0.75) 2(-0.5,0.25) 3(-0.5,-0.25) 4(-0.5,-0.75) 5(0.5,-0.75) 6(0.5,-0.25) 7(0.5,0.25) 8(0.5,0.75)
0603 [mil] "0603-RES"
  rect 44x40 smd: 1(-33.46,0) 2(34,0)
0805 [mm]
  rect 1x1.27 smd: 1(-1.016,0) 2(1.016,0)
  body extent -1.27,-0.76 1.27,0.76, height 0.8
0806 [mm]
  rect 1x1.65 smd: 1(-1.016,0) 2(1.016,0)
  body extent -1,-0.8 1,0.8, height 0.5
1210 [mm]
  rect 1.52x2.5 smd: 1(-1.715,0) 2(1.715,0)
AD7357 [mm]
  rect 1.2x0.35 smd: 1(-3.2,2.275) 2(-3.2,1.625) 3(-3.2,0.975) 4(-3.2,0.325) 5(-3.2,-0.325) 6(-3.2,-0.975) 7(-3.2,-1.625) 8(-3.2,-2.275) 9(3.2,-2.275) 10(3.2,-1.625) 11(3.2,-0.975) 12(3.2,-0.325) 13(3.2,0.325) 14(3.2,0.975) 15(3.2,1.625) 16(3.2,2.275)
  silkscreen extent -1.2,1.9 -0.9,1.9, body extent -2.2,-2.5 2.2,2.5, height 1.2
AD9767 [mm]
  rect 1.8x0.3 smd: 1(-4,2.75) 2(-4,2.25) 3(-4,1.75) 4(-4,1.25) 5(-4,0.75) 6(-4,0.25) 7(-4,-0.25) 8(-4,-0.75) 9(-4,-1.25) 10(-4,-1.75) 11(-4,-2.25) 12(-4,-2.75) 25(4,-2.75) 26(4,-2.25) 27(4,-1.75) 28(4,-1.25) 29(4,-0.75) 30(4,-0.25) 31(4,0.25) 32(4,0.75) 33(4,1.25) 34(4,1.75) 35(4,2.25) 36(4,2.75)
  rect 0.3x1.8 smd: 13(-2.75,-4) 14(-2.25,-4) 15(-1.75,-4) 16(-1.25,-4) 17(-0.75,-4) 18(-0.25,-4) 19(0.25,-4) 20(0.75,-4) 21(1.25,-4) 22(1.75,-4) 23(2.25,-4) 24(2.75,-4) 37(2.75,4) 38(2.25,4) 39(1.75,4) 40(1.25,4) 41(0.75,4) 42(0.25,4) 43(-0.25,4) 44(-0.75,4) 45(-1.25,4) 46(-1.75,4) 47(-2.25,4) 48(-2.75,4)
  silkscreen extent -3.6,-3.6 3.6,3.6
DFN-10P-3X3 [mm]
  rect 0.75x0.25 smd mask+0.064: 1(-1.451,0.999) 2(-1.451,0.499) 3(-1.451,-0.001) 4(-1.451,-0.501) 5(-1.451,-1.001) 6(1.4,-1.001) 7(1.4,-0.501) 8(1.4,-0.001) 9(1.4,0.499) 10(1.4,0.999)
  rect 1.64x2.6 smd: 11(-0.025,-0.001)
  silkscreen extent -1.96,-1.63 1.9,1.95
GH1.25-6 [mm]
  rect 1x2.8 smd: 0(-5.1,-1.5) 0(4.9,-1.5)
  rect 0.6x1.8 smd: 1(-3.125,1.45) 2(-1.875,1.45) 3(-0.625,1.45) 4(0.625,1.45) 5(1.875,1.45) 6(3.125,1.45)
  body extent -5.48,-3.1 5.27,1.75, height 4.25
LQFP100_N [mm]
  oval 1.8x0.3 smd: 1(-7.55,6) 2(-7.55,5.5) 3(-7.55,5) 4(-7.55,4.5) 5(-7.55,4) 6(-7.55,3.5) 7(-7.55,3) 8(-7.55,2.5) 9(-7.55,2) 10(-7.55,1.5) 11(-7.55,1) 12(-7.55,0.5) 13(-7.55,0) 14(-7.55,-0.5) 15(-7.55,-1) 16(-7.55,-1.5) 17(-7.55,-2) 18(-7.55,-2.5) 19(-7.55,-3) 20(-7.55,-3.5) 21(-7.55,-4) 22(-7.55,-4.5) 23(-7.55,-5) 24(-7.55,-5.5) 25(-7.55,-6) 51(7.55,-6) 52(7.55,-5.5) 53(7.55,-5) 54(7.55,-4.5) 55(7.55,-4) 56(7.55,-3.5) 57(7.55,-3) 58(7.55,-2.5) 59(7.55,-2) 60(7.55,-1.5) 61(7.55,-1) 62(7.55,-0.5) 63(7.55,0) 64(7.55,0.5) 65(7.55,1) 66(7.55,1.5) 67(7.55,2) 68(7.55,2.5) 69(7.55,3) 70(7.55,3.5) 71(7.55,4) 72(7.55,4.5) 73(7.55,5) 74(7.55,5.5) 75(7.55,6)
  oval 0.3x1.8 smd: 26(-6,-7.55) 27(-5.5,-7.55) 28(-5,-7.55) 29(-4.5,-7.55) 30(-4,-7.55) 31(-3.5,-7.55) 32(-3,-7.55) 33(-2.5,-7.55) 34(-2,-7.55) 35(-1.5,-7.55) 36(-1,-7.55) 37(-0.5,-7.55) 38(0,-7.55) 39(0.5,-7.55) 40(1,-7.55) 41(1.5,-7.55) 42(2,-7.55) 43(2.5,-7.55) 44(3,-7.55) 45(3.5,-7.55) 46(4,-7.55) 47(4.5,-7.55) 48(5,-7.55) 49(5.5,-7.55) 50(6,-7.55) 76(6,7.55) 77(5.5,7.55) 78(5,7.55) 79(4.5,7.55) 80(4,7.55) 81(3.5,7.55) 82(3,7.55) 83(2.5,7.55) 84(2,7.55) 85(1.5,7.55) 86(1,7.55) 87(0.5,7.55) 88(0,7.55) 89(-0.5,7.55) 90(-1,7.55) 91(-1.5,7.55) 92(-2,7.55) 93(-2.5,7.55) 94(-3,7.55) 95(-3.5,7.55) 96(-4,7.55) 97(-4.5,7.55) 98(-5,7.55) 99(-5.5,7.55) 100(-6,7.55)
  silkscreen extent -7.68,-6.25 6.25,6.82
MICRO-YZX [mm]
  rect 0.4x1.5 smd: 1(-1.3,5.85) 5(1.3,5.85)
  rect 0.3x1.5 smd: 2(-0.65,5.85) 3(0,5.85) 4(0.65,5.85)
  oval 1x1.7 hole 0.8 slot 1.2 at 90 deg: 5(-3.625,2.82) 5(3.625,2.82)
  oval 1.1x1.2 hole 0.7: 5(-2.425,5.5) 5(2.425,5.5)
  rect 4x2 smd: 5(0,2.95)
  silkscreen extent -3.4,4.05 3.4,5.25
MSOP8/VSSOP8 [mm]
  rect 1.45x0.45 smd: 1(-2.2,0.975) 2(-2.2,0.325) 3(-2.2,-0.325) 4(-2.2,-0.975) 5(2.2,-0.975) 6(2.2,-0.325) 7(2.2,0.325) 8(2.2,0.975)
  silkscreen extent -0.9,0.85 -0.65,1.05
OSCILLATOR-3.2X2.5 [mil] "OSCILLATOR-3.2X2.5"
  rect 56x48 smd: 1(-43.31,-33.46) 2(44,-33.46) 3(44,34) 4(-43.31,34)
  silkscreen extent -95,-83 83,71
SOT23-5 [mil] "SOT23-5"
  rect 22x48 smd: 1(-37.4,-51.19) 2(0,-51.19) 3(38,-51.19) 4(38,52) 5(-37.4,52)
  silkscreen extent -56,-17 56,32
"TestPad - 1mm" [mm]
  round 1 smd: 1(0,0)
TF [mm]
  rect 0.55x1.6 smd: 1(10,10.1) 2(8.9,10.1) 3(7.8,10.1) 4(6.7,10.1) 5(5.6,10.1) 6(4.5,10.1) 7(3.4,10.1) 8(2.3,10.1) 9(1.2,10.1)
  rect 1.2x2.2 smd: SHELL(0,0) SHELL(15.5,0)
  rect 1.2x1.4 smd: SHELL(0,9.6)
  rect 1.6x1.4 smd: SHELL(14.6,9.6)
  silkscreen extent 0.41,-4.42 14.9,9.4
TXC_7Q [mm]
  rect 1x0.9 smd: 1(-1.275,-0.9) 2(1.275,-0.9) 3(1.275,0.9) 4(-1.275,0.9)
  silkscreen extent -2.52,-1.6 1.78,1.35
USB3300 [mm]
  round 0.75 hole 0.4: 0(-1,-1) 0(-1,1) 0(1,-1) 0(1,1)
  rect 0.8x0.25 smd: 1(-2.6,1.75) 2(-2.6,1.25) 3(-2.6,0.75) 4(-2.6,0.25) 5(-2.6,-0.25) 6(-2.6,-0.75) 7(-2.6,-1.25) 8(-2.6,-1.75) 17(2.6,-1.75) 18(2.6,-1.25) 19(2.6,-0.75) 20(2.6,-0.25) 21(2.6,0.25) 22(2.6,0.75) 23(2.6,1.25) 24(2.6,1.75)
  rect 0.25x0.8 smd: 9(-1.75,-2.6) 10(-1.25,-2.6) 11(-0.75,-2.6) 12(-0.25,-2.6) 13(0.25,-2.6) 14(0.75,-2.6) 15(1.25,-2.6) 16(1.75,-2.6) 25(1.75,2.6) 26(1.25,2.6) 27(0.75,2.6) 28(0.25,2.6) 29(-0.25,2.6) 30(-0.75,2.6) 31(-1.25,2.6) 32(-1.75,2.6)
  silkscreen extent -2.5,-2.5 2.5,2.5, body extent -2.5,-2.5 2.5,2.5, height 0.85

## Part data
C1 C2 C3 C4 C5 C6 C12 C13 C14 C15 C29 C30 C31 C32 C41 C43 C89 C90 C91 C92 C96 C108 C109 C110 C111 C112: library part CAP0402-CAP, "<b>Capacitor</b> / Standard 0603 ceramic capacitor, and 0.1\" leaded capacitor."
C7 C53 C54 C55 C56: library part CAP/0402
C8 C9 C10 C11 C16 C17 C18 C19 C20 C21 C22 C23 C24 C25 C26 C27 C28 C33 C34 C35 C36 C37 C38 C39 C40 C42 C44 C45 C46 C47 C48 C49 C50 C51 C52 C57 C58 C59 C60 C61 C62 C63 C64 C65 C66 C67 C68 C69 C70 C71 C72 C73 C74 C75 C76 C77 C78 C79 C80 C81 C82 C83 C84 C85 C86 C87 C88 C93 C94 C95: library part Cap, "Capacitor"
L1 L2 L3 L4 L5 L6 L7 L8 L9 L10 L11 L12 L13 L14 L15 L16 L17 L18: library part L/2.5*2.0
P2: "Connector SMD USB Micro Type B middle mount"
R1 R11 R12 R14 R16: library part RES/0402_3
R2 R3 R4 R5 R6 R7 R8 R9 R10 R13 R15 R17 R18 R19 R20 R21 R22 R23 R24 R25 R26 R27 R28 R29 R30 R31 R32 R33 R34 R35 R36 R37 R38 R39 R40 R41 R42 R43 R44 R45 R46 R47 R48 R49 R50 R51 R52 R53 R54 R55 R56 R57 R58 R59 R60 R61 R62 R64: library part Res2, "Resistor"
R63: "Resistor"
U1: library part STM32F103VBT6, "STM32 ARM-based 32-bit MCU with 64 Kbytes Flash, 100-pin LQFP, Industrial Temperature"
U2 U5: library part LP5907
USB2: library part USB_Micro_TypeB, "Connector SMD USB Micro Type B middle mount"
X1 X2: library part OSCILLATOR-3.2X2.5, "Crystal Oscillator in 3.2x2.5 SMD"

## Free pads (board coordinates)
  round 1 hole 0.3: 0(-17.704,30.988) 1(-59.03,24.384) 2(-49.505,23.825) 3(-47.295,23.851) 4(-44.272,23.876)

## Via types
v1: diameter 0.508, hole 0.305, Top Layer to Bottom Layer, 105 vias
v2: diameter 0.5, hole 0.3, Top Layer to Bottom Layer, 91 vias
v3: diameter 0.35, hole 0.2, Top Layer to Bottom Layer, 68 vias
v4: diameter 0.508, hole 0.3, Top Layer to Bottom Layer, 24 vias

## Nets (pads, with @x,y where several pads share a name; then routed paths per layer and width w, separated by ;. In a path a pad name is that pad's centre, name@x,y a point inside that pad or via, vN(x,y) a via of type N, cw(c..) or ccw(c..) an arc to the next point about the centre after c; other vN are vias at no path point)
1.8: C8.2 C11.2 C54.2 L17.2 R11.2 U3.4 U4.8 U4.41 | length 40.1
  Top Layer w0.152: U4.8@-55.054,57.071 -54.156,57.071 -53.924,57.302 -53.896,57.331 v4(-53.848,57.331) ; v4(-48.082,57.074) -48.079,57.071 U4.41@-47.054,57.071
  Bottom Layer w0.152: U3.4@-55.223,67.505 -55.67,67.505 -55.829,67.665 -55.829,70.332 -55.524,70.637 -54.611,70.637 R11.2@-54.026,70.052 ; C8.2@-53.518,57.353 -52.4,56.236 -49.403,56.236 C11.2@-48.514,57.125 ; L17.2@-48.819,67.893 L17.2@-48.819,68.274
  Bottom Layer w0.254: v4(-53.848,57.331) -53.851,57.331 -53.896,57.375 -59.487,62.967 -59.487,68.19 -56.871,70.807 -51.351,70.807 C54.2@-50.343,69.798 L17.2@-48.819,68.274
2.5A: C20.2 C30.1 C93.1 C94.1 R31.1 R34.1 U5.5 U7.9 U11.5 U13.5 | length 44.5
  Top Layer w0.203: v2(-49.428,33.63) -47.6,35.458 C20.2@-42.697,35.458
  Top Layer w0.254: C30.1@-44.069,32.678 -43.535,33.212 ; U5.5@-40.843,35.042 -42.281,35.042 C20.2@-42.316,35.077 -42.316,34.431 -43.535,33.212 ; U11.5@-29.083,24.623 -29.837,25.377 -29.837,25.933 R31.1@-30.793,25.933 -31.555,26.695 -38.684,26.695 -39.522,27.534 -39.522,32.131 -40.604,33.212 U7.9@-41.63,33.212 -43.535,33.212
  Bottom Layer w0.203: U13.5@-58.649,35.342 -57.717,36.273 C94.1@-57.717,36.398 R34.1@-56.634,36.398 -56.075,36.957 -52.756,36.957 v2(-49.428,33.63)
3.3A: C50.2 C67.1 C68.1 R19.1 R47.2 U2.5 U14.47 | length 13.5
  Top Layer w0.203: U14.47@-56.983,41.314 v2(-56.983,42.915)
  Top Layer w0.254: v2(-52.019,39.98) -51.156,39.116 R19.1@-50.38,39.116
  Bottom Layer w0.203: R47.2@-58.42,41.656 -57.285,41.656 C68.1@-56.896,41.267 -56.896,42.24 -56.896,42.328 C67.1@-56.705,42.52
  Bottom Layer w0.254: C67.1@-56.896,42.24 -54.889,40.234 C50.2@-52.273,40.234 ; C50.2@-52.233,40.274 U2.5@-52.233,41.707
3.3D: C1.2 C4.2 C5.2 C6.2 C7.2 C9.2 C10.2 C13.2 C14.2 C16.2 C17.2 C18.2 C29.1 C56.2 C70.1 C71.1 C109.1 L18.2 P1.4 R1.2 R2.1 R3.2 R4.2 R6.2 R7.2 R9.2 R15.2 R64.2 TF1.4 U1.6 U1.11 U1.21 U1.22 U1.28 U1.50 U1.75 U1.100 U4.6 U4.23 U4.39 U4.57 U7.16 U9.6 U9.16 U9.25 U9.30 U9.31 U14.16 U14.22 Y1.4 | length 222.6
  Top Layer w0.203: Y1.4@-62.662,57.344 R3.2@-62.662,58.42 ; Y1.4@-62.498,57.18 -61.692,57.18 C16.2@-61.214,57.658 -58.42,60.452 R6.2@-58.42,63.246 -57.429,64.237 -57.429,66.065 R9.2@-58.42,67.056 ; v1(-60.985,48.006) C70.1@-60.985,51.138 ; v1(-58.014,47.904) -58.014,48.198 -57.983,48.229 U14.16@-57.983,49.314 C71.1@-57.983,50.89 ; U4.6@-55.054,57.871 -54.118,57.871 -53.873,58.115 v1(-53.823,58.115) ; U4.23@-51.654,52.871 v1@-51.654,54.067 ; U4.57@-51.254,60.871 C10.2@-51.254,62.354 ; v1(-48.225,56.271) U4.39@-47.054,56.271 ; v2(-44.323,27.61) -43.544,27.61 C29.1@-42.832,28.321 ; v2(-19.38,64.618) -17.319,62.556 -17.319,59.186 v2(-17.367,59.186)
  Top Layer w0.254: P1.4@-61.288,64.526 -58.989,64.526 -58.42,63.957 R6.2@-58.42,63.246 ; R7.2@-50.267,50.165 v1(-49.835,50.165) R15.2@-49.403,50.165 ; C29.1@-42.832,28.321 -42.491,28.662 U7.16@-41.63,28.662 ; v4@-41.688,51.441 U1.75@-41.688,53.004 ; v1(-40.843,67.462) -40.259,67.462 -40.138,67.341 U1.50@-40.138,66.554 ; -29.132,63.004 U1.21@-26.588,63.004 -25.312,63.004 -25.113,63.203 R2.1@-25.113,63.729 ; C4.2@-28.88,68.174 -29.138,67.916 U1.28@-29.138,66.554 -29.171,66.521 -29.171,58.737 -28.042,57.607 ; C13.2@-28.138,49.764 U1.100@-28.138,51.454 -28.104,51.488 -28.104,52.997 -28.138,53.03 v2@-28.138,53.309 ; U1.22@-26.588,63.504 -25.337,63.504 R2.1@-25.113,63.729 ; v1(-25.121,64.338) -25.121,63.737 R2.1@-25.113,63.729 ; C14.2@-24.933,58.004 U1.11@-26.588,58.004 -27.645,58.004 -28.042,57.607 ; v2(-23.647,52.705) -23.647,53.873 -25.278,55.504 U1.6@-26.588,55.504 -27.717,55.504 -28.042,55.829 -28.042,57.607
  Signal Layer 1 w0.254: v4(-41.656,51.41) -41.656,66.65 v1(-40.843,67.462)
  Bottom Layer w0.152: v1(-25.121,64.338) -25.121,64.286 -24.978,64.143 -24.386,63.551 -22.073,63.551 ; U9.6@-21.831,64.347 -21.831,63.793 -22.073,63.551 ; R64.2@-19.177,64.262 -20.066,64.262 -20.777,63.551 -22.073,63.551
  Bottom Layer w0.203: v1@-60.985,47.955 v1(-60.985,48.006) -60.985,48.633 ; -60.96,48.633 -60.034,49.559 -56.859,49.559 ; v2(-58.217,63.043) -57.633,62.459 ; v1(-58.014,47.904) -58.014,47.955 -57.785,48.184 -57.785,48.633 -56.859,49.559 ; v1(-53.823,58.115) -53.873,58.115 -57.633,61.874 -57.633,62.459 ; C7.2@-53.645,64.718 R1.2@-53.645,63.956 -53.645,63.627 -53.212,63.194 -51.232,63.194 ; C9.2@-53.574,58.35 -52.971,58.953 -48.692,58.953 -47.549,57.81 -47.549,56.889 -48.167,56.271 v1(-48.225,56.271) -48.489,56.007 C18.2@-48.489,55.575 -48.489,55.347 -49.505,54.331 C17.2@-51.435,54.331 ; v1(-51.664,54.077) -51.664,51.994 v1(-49.835,50.165) ; v2(-44.323,27.61) -48.539,31.826 -48.539,48.87 v1(-49.835,50.165) ; C1.2@-41.504,51.537 -40.95,52.09 TF1.4@-40.95,53.298 ; v1(-40.843,67.462) -41.173,67.793 -47.015,67.793 L18.2@-48.819,65.988 -50.343,64.464 C56.2@-50.343,64.083 -51.232,63.194 ; -28.143,66.269 -28.143,65.583 -27.762,65.202 -26.365,65.202 -26.06,64.897 -26.06,63.246 -25.812,62.997 U9.31@-25.181,62.997 -24.556,62.997 -24.386,63.168 -24.386,63.551 ; U9.30@-25.181,62.497 -24.498,62.497 -24.384,62.611 -24.384,63.166 ; U9.16@-19.981,59.997 -19.981,59.528 -19.812,59.36 -19.134,59.36 C109.1@-18.626,58.852 -18.186,58.852 -17.831,59.207 -17.389,59.207 v2(-17.367,59.186) ; -57.633,62.459 v2(-51.562,62.459) -51.562,62.864 -51.232,63.194 ; -56.859,49.559 -56.094,49.559 -56.065,49.53 -55.543,49.53 -55.245,49.828 -55.245,49.97 -55.05,50.165 v1(-49.835,50.165)
  Bottom Layer w0.254: v1(-40.843,67.462) -38.811,69.494 -33.858,69.494 -31.623,67.259 -29.134,67.259 -28.143,66.269 ; v2(-28.143,53.315) -27.534,52.705 v2(-23.647,52.705) ; R4.2@-25.273,58.445 -25.273,58.191 -24.892,57.81 v1(-24.816,57.81) ; R4.2@-25.181,58.538 -24.968,58.75 -24.968,59.785 U9.25@-25.181,59.997
5V: C19.2 C42.2 C53.2 C55.2 P2.1 R16.1 R18.2 R60.1 U2.1 U3.3 U3.7 U3.9 U5.1 U5.3 USB2.1 | length 128
  Top Layer w0.152: v2(-51.753,66.555) v2@-51.594,66.555
  Top Layer w0.254: v2(-57.252,67.513) -55.728,65.989 -52.319,65.989 v2(-51.753,66.555) -47.569,70.739 -28.6,70.739 -26.289,68.428 -20.777,68.428 -20.265,67.915 USB2.1@-20.265,66.946 -20.265,64.724 ; v2(-49.657,47.244) -48.108,45.695 -45.466,45.695 -42.012,49.149 -39.497,49.149 R18.2@-38.583,48.235 v2@-37.871,47.523 ; v2(-38.222,37.444) U5.3@-38.222,36.957 -38.989,36.957 -39.319,36.627 -39.319,35.382 -38.979,35.042 U5.1@-38.222,35.042 C19.2@-36.764,35.042 ; v2(-22.484,49.881) P2.1@-20.709,49.881 -19.817,49.881 -19.279,50.419 -19.279,55.245 -16.739,57.785 -16.739,63.297 -18.669,65.227 -19.761,65.227 -20.265,64.724 ; R60.1@-21.446,64.287 -20.701,64.287 -20.265,64.724
  Bottom Layer w0.152: U3.9@-52.372,66.505 -51.859,66.505 v2@-51.714,66.65 ; U3.7@-52.372,67.505 -51.859,67.505 -51.714,67.361 v2@-51.714,66.65 ; v2(-51.753,66.555) -51.689,66.619 -51.689,66.65 v2@-51.714,66.65
  Bottom Layer w0.254: C53.2@-57.684,67.513 v2(-57.252,67.513) -56.465,67.513 -55.957,67.005 U3.3@-55.223,67.005 ; C42.2@-52.273,45.949 -50.978,47.244 v2(-49.657,47.244) ; C42.2@-52.233,45.908 U2.1@-52.233,44.328 -52.233,43.749 -51.545,43.061 R16.1@-49.149,43.061 ; v2(-38.222,37.444) -38.222,47.046 v2(-37.719,47.549) -37.389,47.219 -25.146,47.219 v2(-22.484,49.881)
AGND: C19.1 C20.1 C21.1 C22.1 C23.1 C24.1 C25.1 C26.1 C27.1 C30.2 C31.2 C32.2 C41.2 C42.1 C43.2 C50.1 C57.2 C58.2 C60.2 C61.2 C62.1 C63.1 C67.2 C68.2 C69.1 C89.2 C90.2 C91.2 C92.2 C93.2 C94.2 C95.1 R17.1 R32.2 R35.2 R38.2 R40.2 R48.1 R49.2 R56.1 R57.2 U2.2 U5.2 U6.6 U7.4 U7.5 U7.11 U8.6 U10.6 U11.2 U12.6 U13.2 U14.38 | length 19.3
  Top Layer w0.203: v2(-64.008,38.989) R56.1@-63.746,38.989 ; R57.2@-60.706,38.989 v2(-60.35,38.989) ; U12.6@-60.005,30.866 -59.263,30.866 -59.286,30.844 v2(-59.293,30.844) ; R48.1@-56.142,39.116 -55.63,39.116 ; v2(-55.63,38.79) -55.63,39.116 ; R49.2@-55.118,39.116 -55.63,39.116 ; U10.6@-53.401,30.866 -52.558,30.866 v2(-52.553,30.861) ; v2(-49.047,42.291) -48.133,42.291 C95.1@-47.371,43.053
  Signal Layer 1 w0.203: v2(-59.293,30.844) v2@-59.241,30.844
  Bottom Layer w0.203: C62.1@-63.111,43.18 -63.111,44.188 -62.443,44.856 C69.1@-59.373,44.856 ; C61.2@-60.071,34.468 -60.071,35.281 -59.792,35.56 v2(-59.792,35.712) ; C68.2@-56.896,40.259 v2(-55.905,40.259) ; C63.1@-55.507,39.243 v2(-55.507,39.734) ; v2(-55.245,30.505) C91.2@-54.889,30.861 ; v2(-54.991,41.783) C67.2@-54.991,42.52 ; R35.2@-54.762,34.315 C60.2@-53.873,34.315 -52.756,34.315 v2(-52.705,34.265) ; C50.1@-50.56,40.234 v2(-50.153,40.64)
  Bottom Layer w0.254: U2.2@-51.283,44.328 -51.283,45.226 C42.1@-50.56,45.949
  other v3: -27.28,22.835 -33.274,23.343 -34.442,23.419 -31.039,23.647 -32.36,23.673 -25.603,24.74 -29.032,26.314 -25.197,27.534 -31.217,27.635 -33.985,27.686 -61.9,30.378 -34.595,30.582 -34.569,31.242 -25.654,31.445 -41.072,31.852 -25.552,33.782 -34.087,34.214 -55.499,34.417 -31.242,34.442 -44.628,34.849 -37.643,35.992 -59.03,36.703 -42.799,37.313 -36.017,37.44 -57.074,38.252 -61.493,42.291 -30.328,43.459 -28.651,43.51 -45.237,43.536 -43.078,44.475 -37.008,44.501 -34.265,44.501 -40.513,44.526 -58.649,45.034 -50.063,45.466 -41.3,45.999 -40.411,45.999
CLK0: U4.7 Y1.3 | length 8.6
  Top Layer w0.152: Y1.3@-62.498,54.63 -62.417,54.712 v1(-61.722,54.712) ; v1(-56.144,57.471) U4.7@-55.054,57.471
  Bottom Layer w0.152: v1(-61.722,54.712) -58.963,57.471 v1(-56.144,57.471)
GND: C1.1 C2.2 C3.2 C4.1 C5.1 C6.1 C8.1 C9.1 C10.1 C11.1 C12.1 C13.1 C14.1 C15.2 C16.1 C17.1 C18.1 C29.2 C53.1 C54.1 C55.1 C56.1 C70.2 C71.2 C108.1 C109.2 C110.1 C111.2 C112.2 P1.0 P1.6 P2.5 R5.1 R10.1 R12.2 R13.1 R14.2 R17.2 R45.2 R46.2 R62.1 TF1.6 TF1.SHELL U1.10 U1.20 U1.27 U1.74 U1.99 U3.2 U3.8 U3.11 U4.0 U7.12 U9.0 U9.1 U9.2 U14.15 U14.21 USB2.5 X1.2 X1.4 X2.2 X2.4 Y1.2 | length 98
  Top Layer w0.152: v1(-61.189,53.34) -61.112,53.34 -61.011,53.238 C70.2@-61.011,52.172 ; U14.21@-60.483,49.314 -60.477,49.319 -60.477,52.603 -60.376,52.705 v1(-60.452,52.781) ; v1(-57.912,52.502) C71.2@-57.912,51.968 -57.912,51.918 -57.404,51.41 -57.404,51.377 -57.379,51.352 -57.379,50.612 -57.483,50.508 U14.15@-57.483,49.314 ; C10.1@-51.257,63.365 -51.122,63.365 v2(-50.724,62.967) ; v2(-21.56,52.481) P2.5@-20.709,52.481
  Top Layer w0.203: R46.2@-65.024,40.996 v2(-65.024,50.216) ; R45.2@-53.467,40.894 v2(-53.162,41.199) ; v2(-44.272,28.321) C29.2@-43.84,28.321 ; U7.12@-41.63,31.262 v2(-40.533,31.262) ; v1(-28.415,58.953) -28.415,62.06 -27.971,62.504 U1.20@-26.588,62.504 ; C14.1@-23.909,57.988 -22.995,57.074 -21.463,57.074 v1(-20.168,55.778)
  Top Layer w0.254: v1(-65.301,60.251) P1.0@-64.238,60.251 ; v1(-65.182,70.251) P1.0@-64.238,70.251 ; v1(-64.973,54.61) -64.319,54.61 Y1.2@-64.298,54.63 ; P1.6@-61.288,62.026 v1(-60.121,62.026) ; C16.1@-61.214,58.666 -61.087,58.793 v1(-61.087,58.979) ; R10.1@-58.428,65.786 v1(-57.963,65.786) ; v1(-43.434,52.934) -42.863,53.504 U1.74@-41.688,53.504 ; v4(-31.09,48.082) R13.1@-31.09,48.598 ; U1.99@-28.638,51.454 v4(-28.638,52.742) ; v4(-28.638,65.315) U1.27@-28.638,66.554 ; v4(-28.169,48.336) C13.1@-28.169,48.725 ; U1.10@-26.588,57.504 -25.424,57.504 -25.424,57.482 -25.197,57.254 v1(-25.197,57.125) ; USB2.5@-23.64,66.946 USB2.5@-22.865,66.946 -22.865,66.924 v4(-23.343,66.446) ; X1.4@-19.101,59.698 C3.2@-19.101,60.757 ; X1.4@-18.89,58.699 C2.2@-17.958,58.699
  Signal Layer 1 w0.203: v2(-53.162,41.199) -53.162,53.238 -52.304,54.097 v2(-52.304,55.621)
  Signal Layer 1 w0.254: -25.375,57.455 -25.197,57.277 v1(-25.197,57.125) ; v1(-20.168,55.778) v1@-20.168,55.817
  Bottom Layer w0.152: v2(-56.692,64.465) R14.2@-56.439,64.718 ; C55.1@-56.566,65.9 v2(-56.134,65.468) ; U3.2@-55.223,66.505 U3.11@-54.297,66.505 ; R12.2@-54.026,69.163 v2(-53.619,69.163) ; v2(-53.797,66.751) U3.11@-53.797,67.005 ; v2(-53.797,67.742) U3.11@-53.797,67.005 ; v2(-52.908,69.265) C54.1@-52.375,69.798 v2(-51.943,69.366) ; v2(-52.603,64.44) -52.375,64.211 C56.1@-52.375,64.083 ; U3.8@-52.372,67.005 U3.11@-53.797,67.005 ; TF1.SHELL@-47.65,63.398 v2(-47.117,62.865) ; C112.2@-17.12,60.198 C112.2@-17.018,60.096
  Bottom Layer w0.203: v2(-44.272,28.321) -43.474,28.321 v2(-40.533,31.262) -39.98,31.816 -39.98,47.32 v3(-40.411,47.752) ; X2.4@-29.905,61.452 X2.4@-29.905,62.069 ; v4(-24.613,65.176) -24.331,64.894 U9.1@-24.331,64.347 ; U9.2@-23.831,64.347 v4(-23.831,65.156)
  Bottom Layer w0.254: v1@-43.332,52.357 C1.1@-42.512,51.537 ; v1(-43.332,52.375) -43.15,52.557 TF1.6@-43.15,53.298 ; X2.4@-29.415,62.56 -29.415,62.84 ; -29.415,63.221 -29.415,62.84 ; C110.1@-29.415,63.636 -29.415,62.84 ; C108.1@-28.415,58.429 v1(-28.415,58.953) X2.2@-28.415,59.629 ; v1(-19.863,58.623) C109.2@-19.634,58.852
  other v2: -51.054,55.621 -49.804,55.621 -52.304,56.871 -51.054,56.871 -49.804,56.871 -52.304,58.121 -51.054,58.121 -49.804,58.121
  other v3: -17.069,49.581 -18.313,50.013 -42.875,51.435 -18.263,52.146 -17.094,52.68 -47.295,53.086 -32.385,53.188 -43.434,55.499 -17.805,60.376 -31.623,64.414 -35.992,64.592 -42.545,67.259 -25.908,67.488
  other v4: -29.947,61.925 -27.153,66.446 -22.962,69.24 -20.041,69.24 -28.796,69.545 -21.565,69.846 -22.962,70.383 -20.041,70.383
NetC2_1: C2.1 C96.2 R8.2 U1.12 X1.3 | length 12.3
  Top Layer w0.152: v4(-27.658,58.538) -27.591,58.471 -26.621,58.471 U1.12@-26.588,58.504 R8.2@-22.97,58.504 ; R8.2@-22.784,58.318 -22.53,58.064 -20.498,58.064 X1.3@-19.507,57.074 ; X1.3@-19.482,57.074 -18.575,57.074 C2.1@-17.958,57.691
  Bottom Layer w0.152: C96.2@-28.448,56.896 -27.658,57.686 v4(-27.658,58.538)
NetC3_1: C3.1 R8.1 U1.13 X1.1 | length 7.5
  Top Layer w0.152: U1.13@-26.588,59.004 -25.727,59.004 -25.701,58.979 -23.131,58.979 R8.1@-22.784,59.326 ; X1.1@-21.221,59.291 -20.109,60.403 C3.1@-20.109,60.757
  Top Layer w0.254: R8.1@-22.784,59.326 -21.256,59.326 X1.1@-21.221,59.291
NetC7_1: C7.1 R1.1 R14.1 U3.1 | length 2.6
  Bottom Layer w0.254: R14.1@-55.431,64.718 C7.1@-54.653,64.718 R1.1@-54.653,63.956 ; R14.1@-55.223,64.927 U3.1@-55.223,66.005
NetC12_2: C12.2 U1.73 | length 2
  Top Layer w0.152: C12.2@-43.536,54.305 -43.235,54.004 U1.73@-41.688,54.004
NetC15_1: C15.1 U1.49 | length 9.9
  Top Layer w0.152: U1.49@-39.638,66.554 -39.638,65.241 -39.61,65.241 v1(-39.599,65.253)
  Signal Layer 1 w0.152: v1@-39.599,65.202 v1(-39.599,65.253)
  Bottom Layer w0.254: v1(-39.599,65.253) C15.1@-31.076,65.253
NetC28_1: C28.1 C33.2 C35.2 L1.1 R20.1 U6.4 | length 9.6
  Top Layer w0.254: v2(-26.772,29.413) -26.721,29.413 -26.248,28.94 ; U6.4@-26.248,29.886 -26.248,28.94 ; R20.1@-22.217,28.448 -25.756,28.448 -26.248,28.94
  Bottom Layer w0.254: C33.2@-29.21,27.559 -29.21,28.44 C35.2@-28.329,28.44 ; C35.2@-28.321,28.448 -27.737,28.448 v2(-26.772,29.413)
NetC28_2: C28.2 R22.1 U6.1 | length 2.2
  Top Layer w0.254: U6.1@-24.298,29.886 -24.003,29.591 R22.1@-22.217,29.591
NetC31_1: C31.1 C32.1 R59.1 U7.6 | length 5
  Top Layer w0.254: v1(-36.287,31.912) U7.6@-35.23,31.912 C32.1@-31.912,31.912
  Bottom Layer w0.254: R59.1@-36.474,31.412 -36.474,31.725 v1(-36.287,31.912)
NetC33_1: C33.1 C34.2 C36.2 L1.2 L2.1 | length 3.5
  Bottom Layer w0.254: C34.2@-32.004,27.559 -32.004,28.44 -30.234,28.44 -30.234,27.575 C33.1@-30.218,27.559
NetC34_1: C34.1 C37.2 L2.2 U7.1 | length 2.8
  Top Layer w0.254: U7.1@-35.23,28.662 -34.657,28.662 -34.417,28.423 v2(-34.442,28.423)
  Bottom Layer w0.254: C37.2@-34.036,28.448 L2.2@-33.02,28.448 -33.012,28.44 C34.1@-33.012,27.559
NetC35_1: C35.1 C38.1 C40.1 L3.2 R25.1 U6.5 | length 11.1
  Top Layer w0.254: v2(-27.754,29.456) -26.899,28.6 -26.899,27.184 -26.248,26.533 ; U6.5@-26.248,25.486 -26.248,26.533 ; R25.1@-22.217,26.924 -25.857,26.924 -26.248,26.533
  Bottom Layer w0.254: C38.1@-29.218,30.353 -29.218,29.472 L3.2@-29.21,29.464 -29.202,29.456 C35.1@-28.321,29.456 v2(-27.754,29.456)
NetC36_1: C36.1 C38.2 C39.1 L3.1 L4.2 | length 3.6
  Bottom Layer w0.254: L4.2@-32.004,30.353 -32.004,29.472 -31.996,29.464 L3.1@-30.218,29.464 -30.226,29.472 C38.2@-30.226,30.353
NetC37_1: C37.1 C39.2 L4.1 U7.2 | length 2.8
  Top Layer w0.254: U7.2@-35.23,29.312 v2(-34.442,29.312) v2@-34.391,29.312
  Signal Layer 1 w0.254: v2(-34.442,29.312) v2@-34.392,29.312
  Bottom Layer w0.254: C37.1@-34.036,29.456 -33.028,29.456 C39.2@-33.02,29.464 -33.012,29.472 L4.1@-33.012,30.353
NetC40_2: C40.2 R24.1 U6.8 | length 2.3
  Top Layer w0.254: U6.8@-24.298,25.486 -23.876,25.908 C40.2@-23.114,25.908 R24.1@-22.217,25.908
NetC41_1: C41.1 C43.1 R59.2 U7.3 | length 4.7
  Top Layer w0.254: v1(-36.195,29.921) U7.3@-35.271,29.921 ; U7.3@-35.23,29.962 C43.1@-32.014,29.962
  Bottom Layer w0.254: R59.2@-36.474,30.404 -36.474,30.201 v1(-36.195,29.921)
NetC44_1: C44.1 C45.2 C47.2 L5.1 R26.1 U8.4 | length 11.2
  Top Layer w0.254: v2(-27.661,32.512) -27.661,34.183 -26.248,35.595 ; U8.4@-26.248,36.49 -26.248,35.595 ; R26.1@-22.217,35.306 -25.959,35.306 -26.248,35.595
  Bottom Layer w0.254: L5.1@-29.218,31.623 -29.218,32.504 C45.2@-29.21,32.512 C47.2@-28.321,32.512 v2(-27.661,32.512)
NetC44_2: C44.2 R28.1 U8.1 | length 2.2
  Top Layer w0.254: U8.1@-24.298,36.49 -24.13,36.322 C44.2@-23.114,36.322 R28.1@-22.217,36.322